# Altium PCB Peak Detector With Banking.PcbDoc (part 1 of 5)
Units mil, origin at the board's own origin, x right, y up, seen from the top; angles counter-clockwise.
Board outline 3330 x 2725 mil, 4 copper layers (TopLayer, GROUND, MidLayer1, BottomLayer); 549 components, 391 nets, 1594 pads, 460 vias.
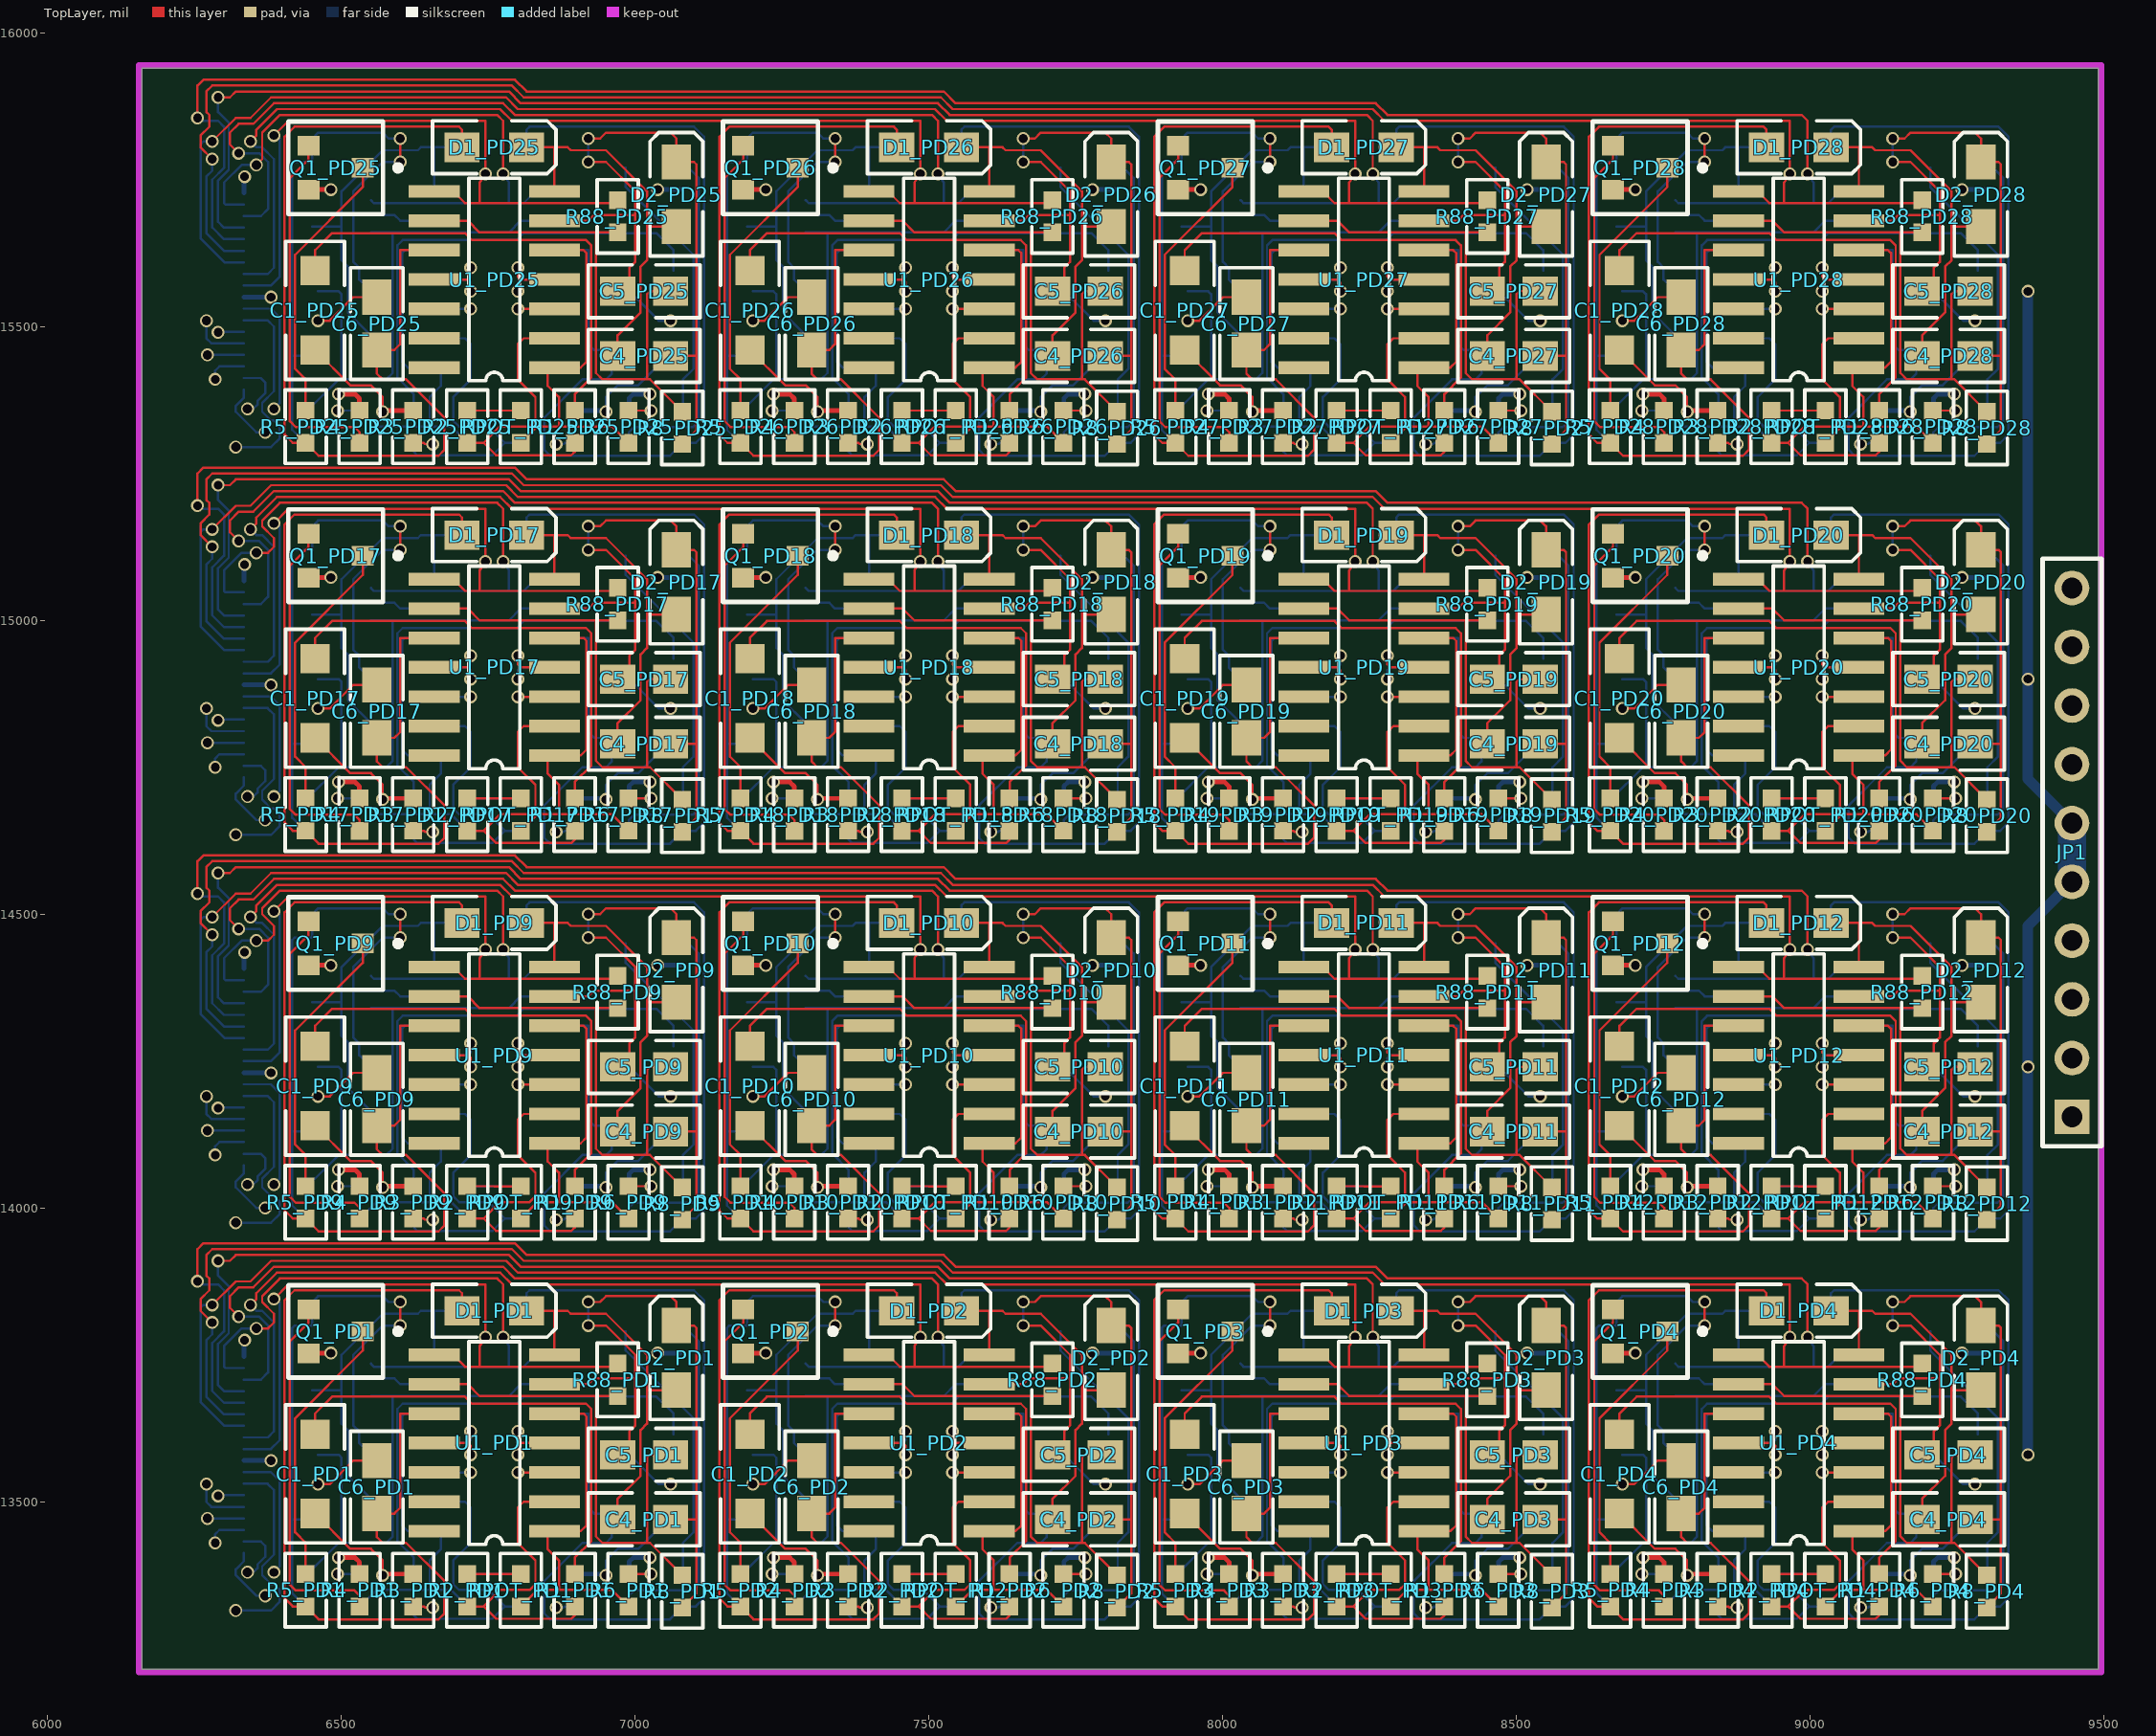
[diagram p0: TopLayer view]
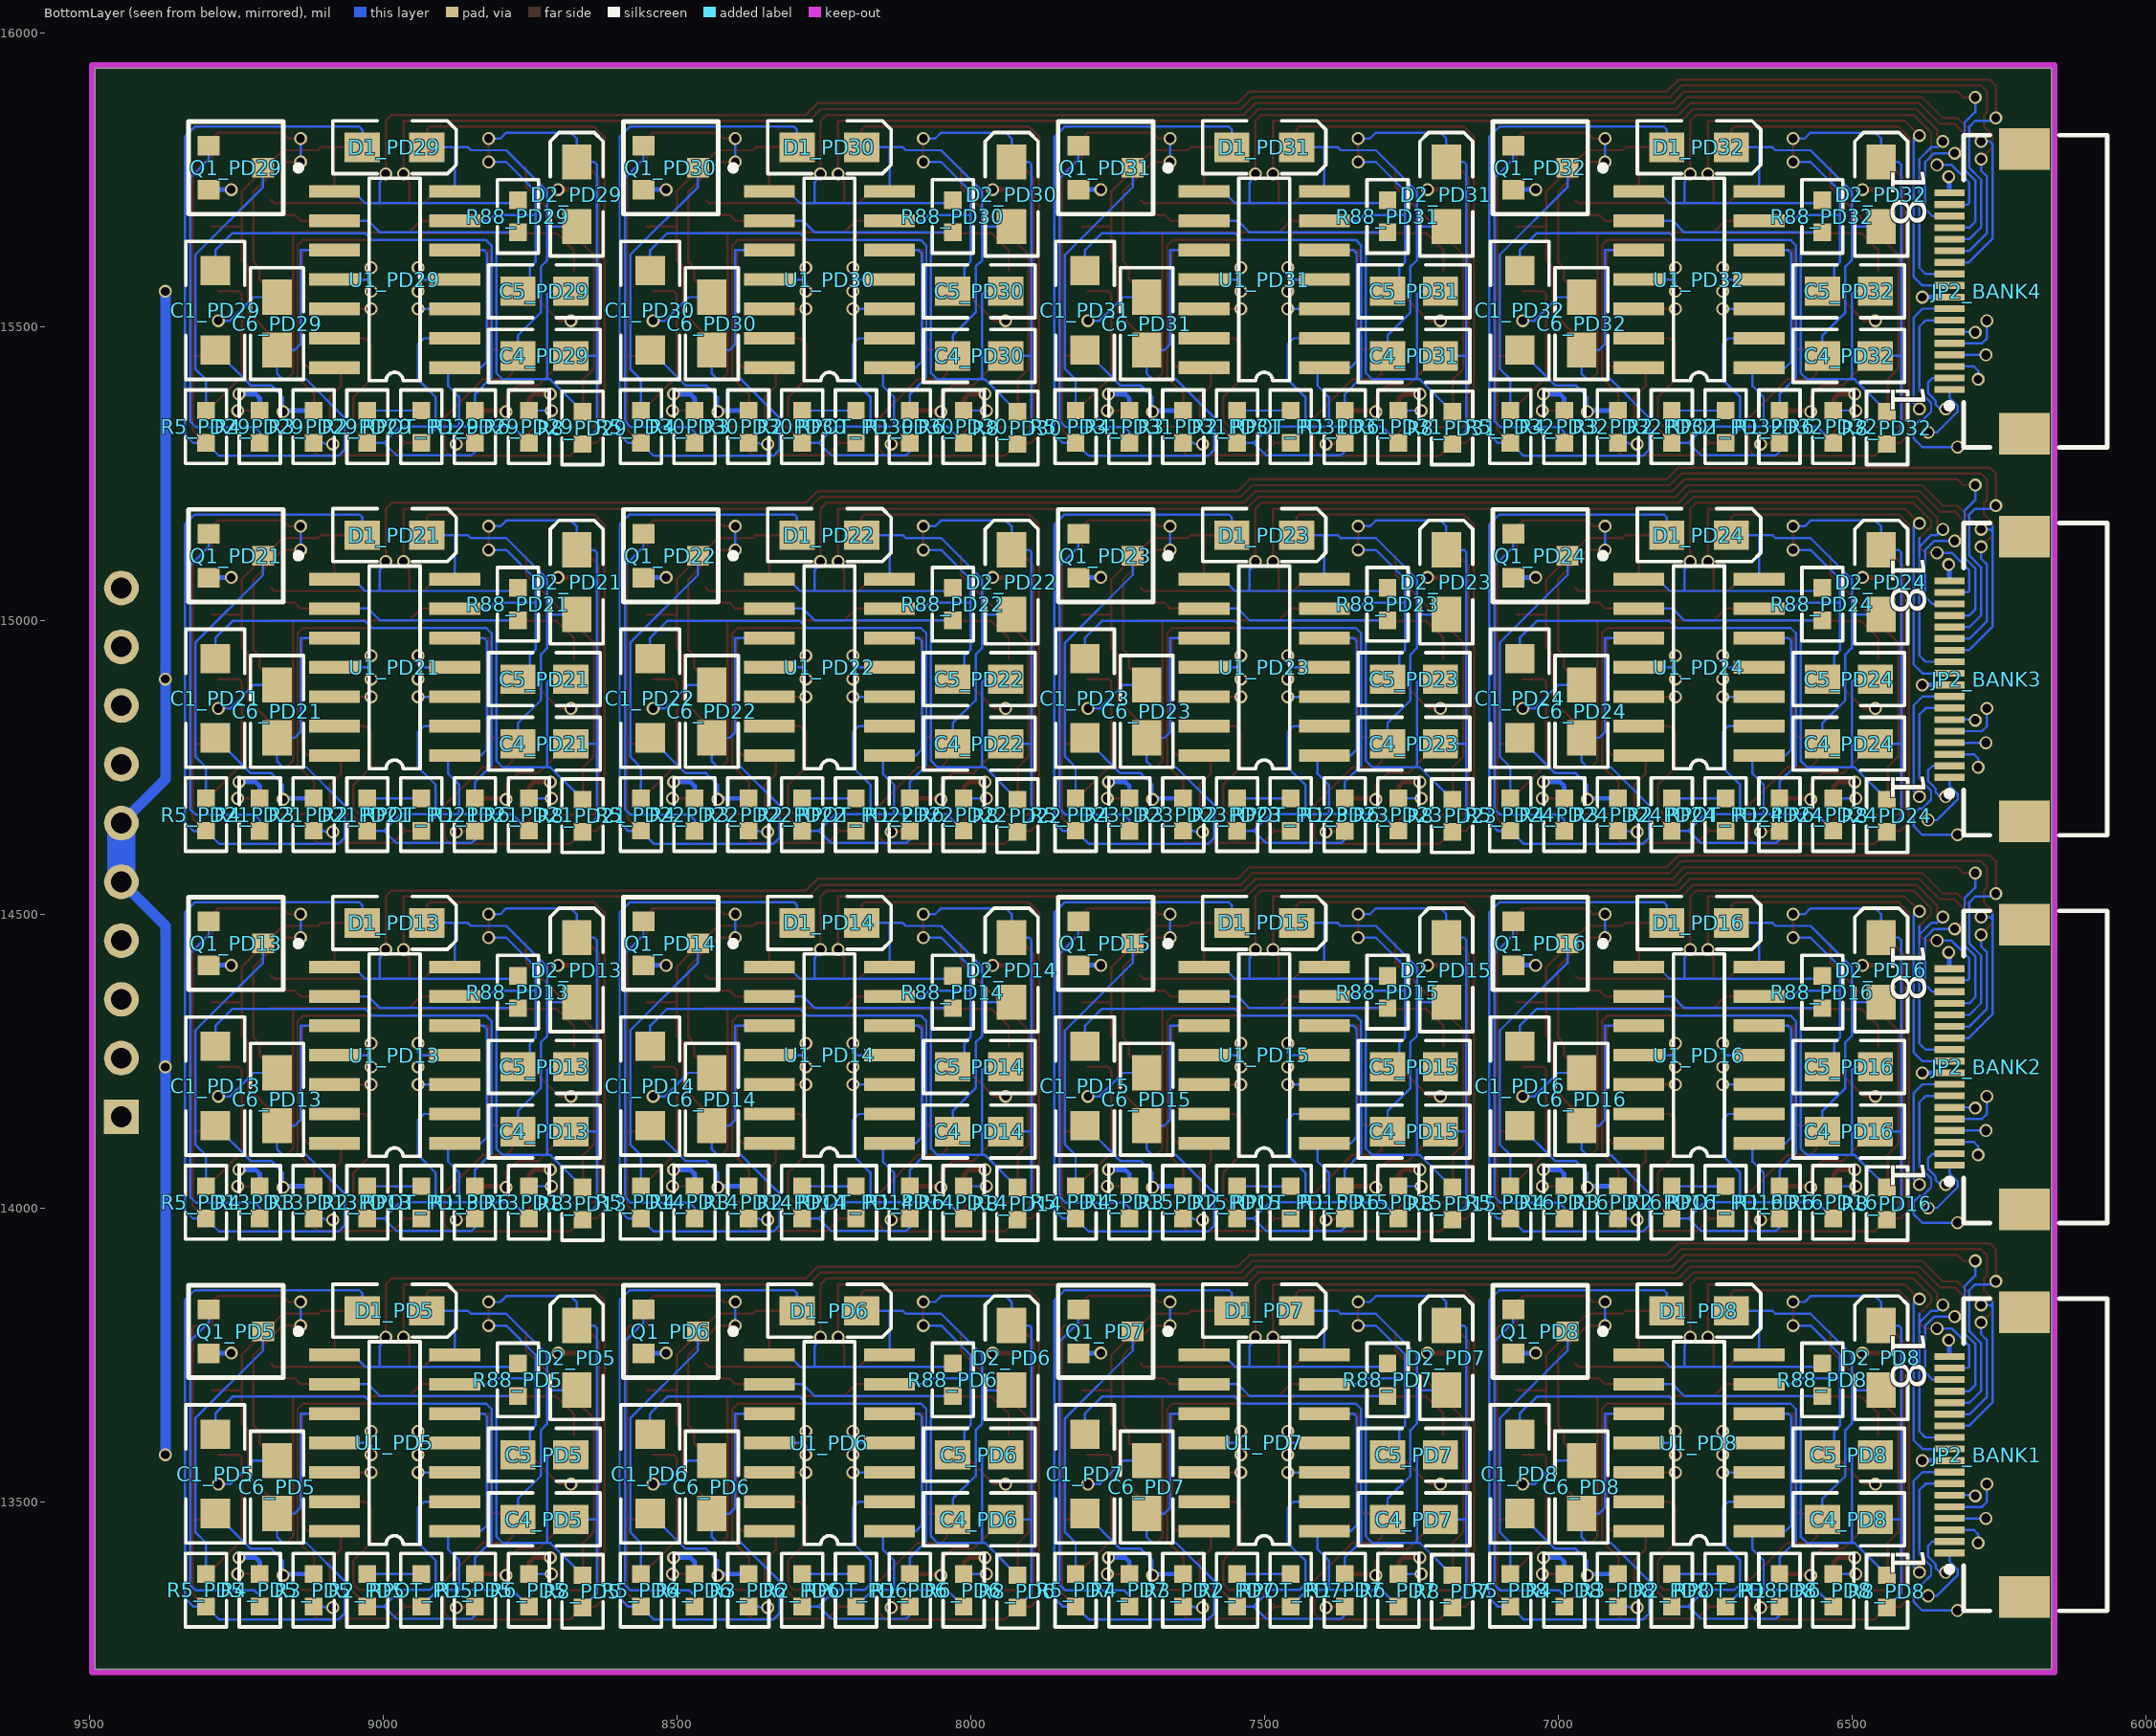
[diagram p1: BottomLayer view, seen from below]
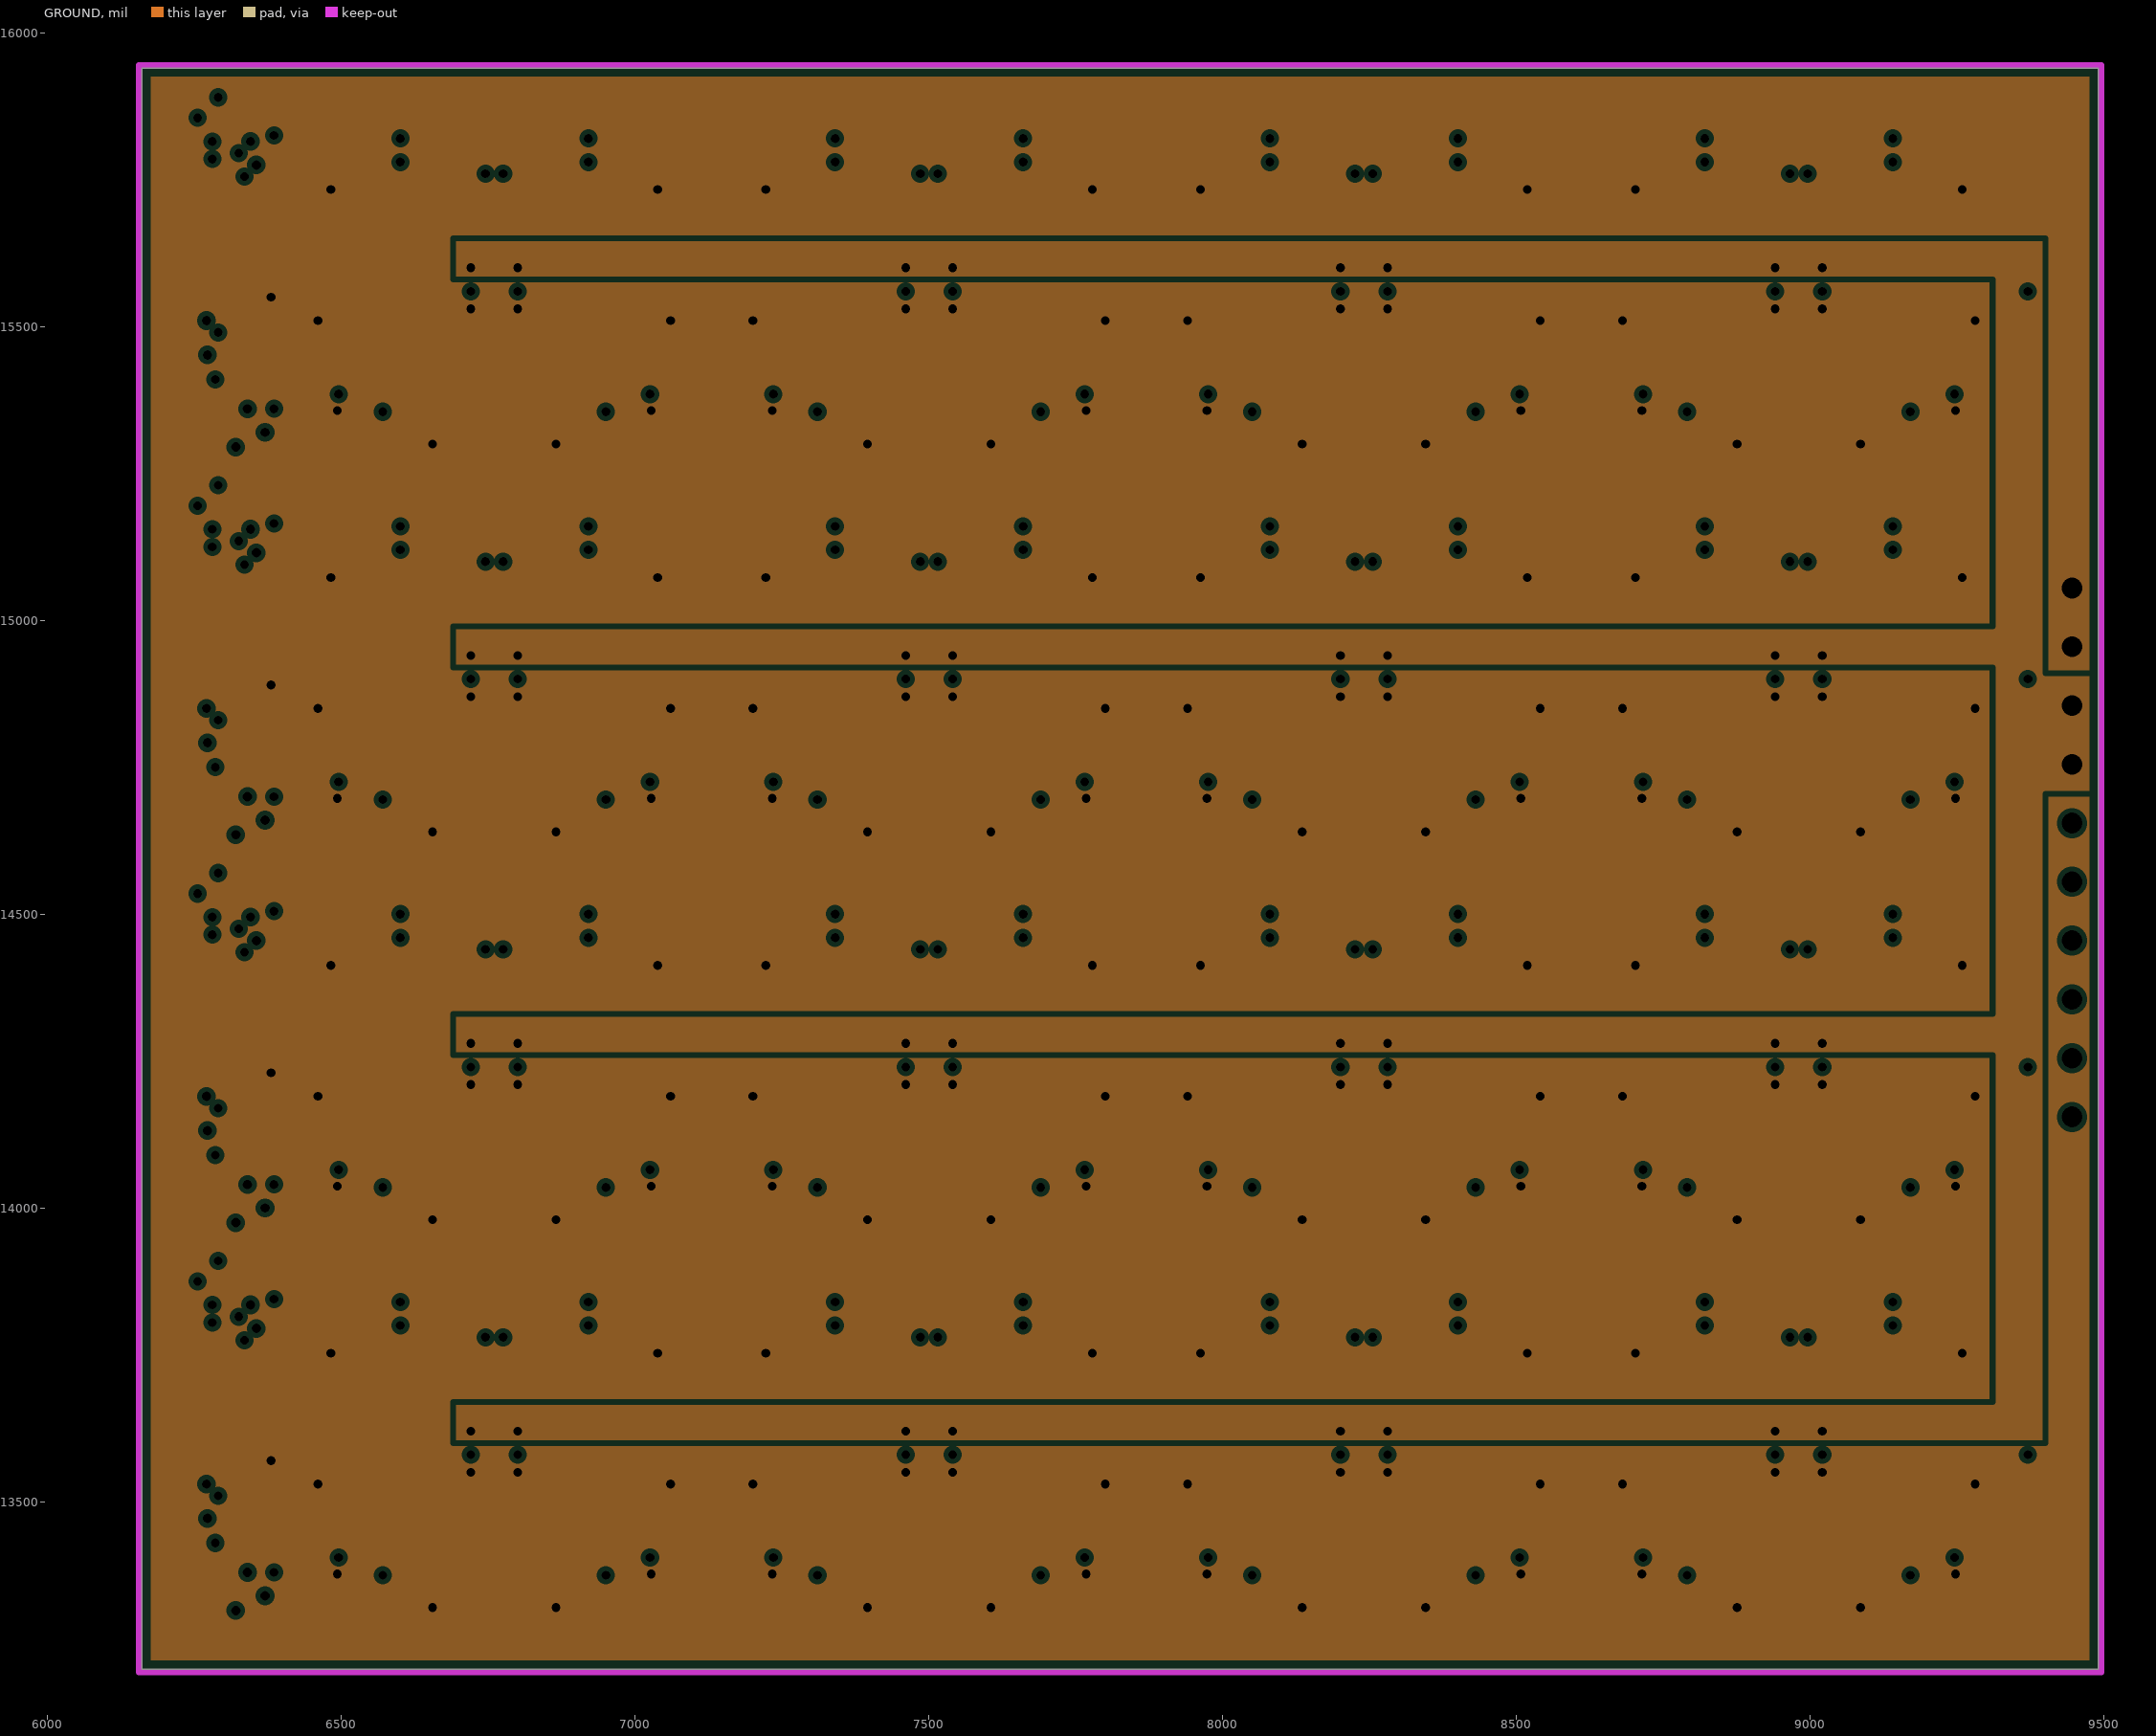
[diagram p2: GROUND, clearances drawn from the general rule]
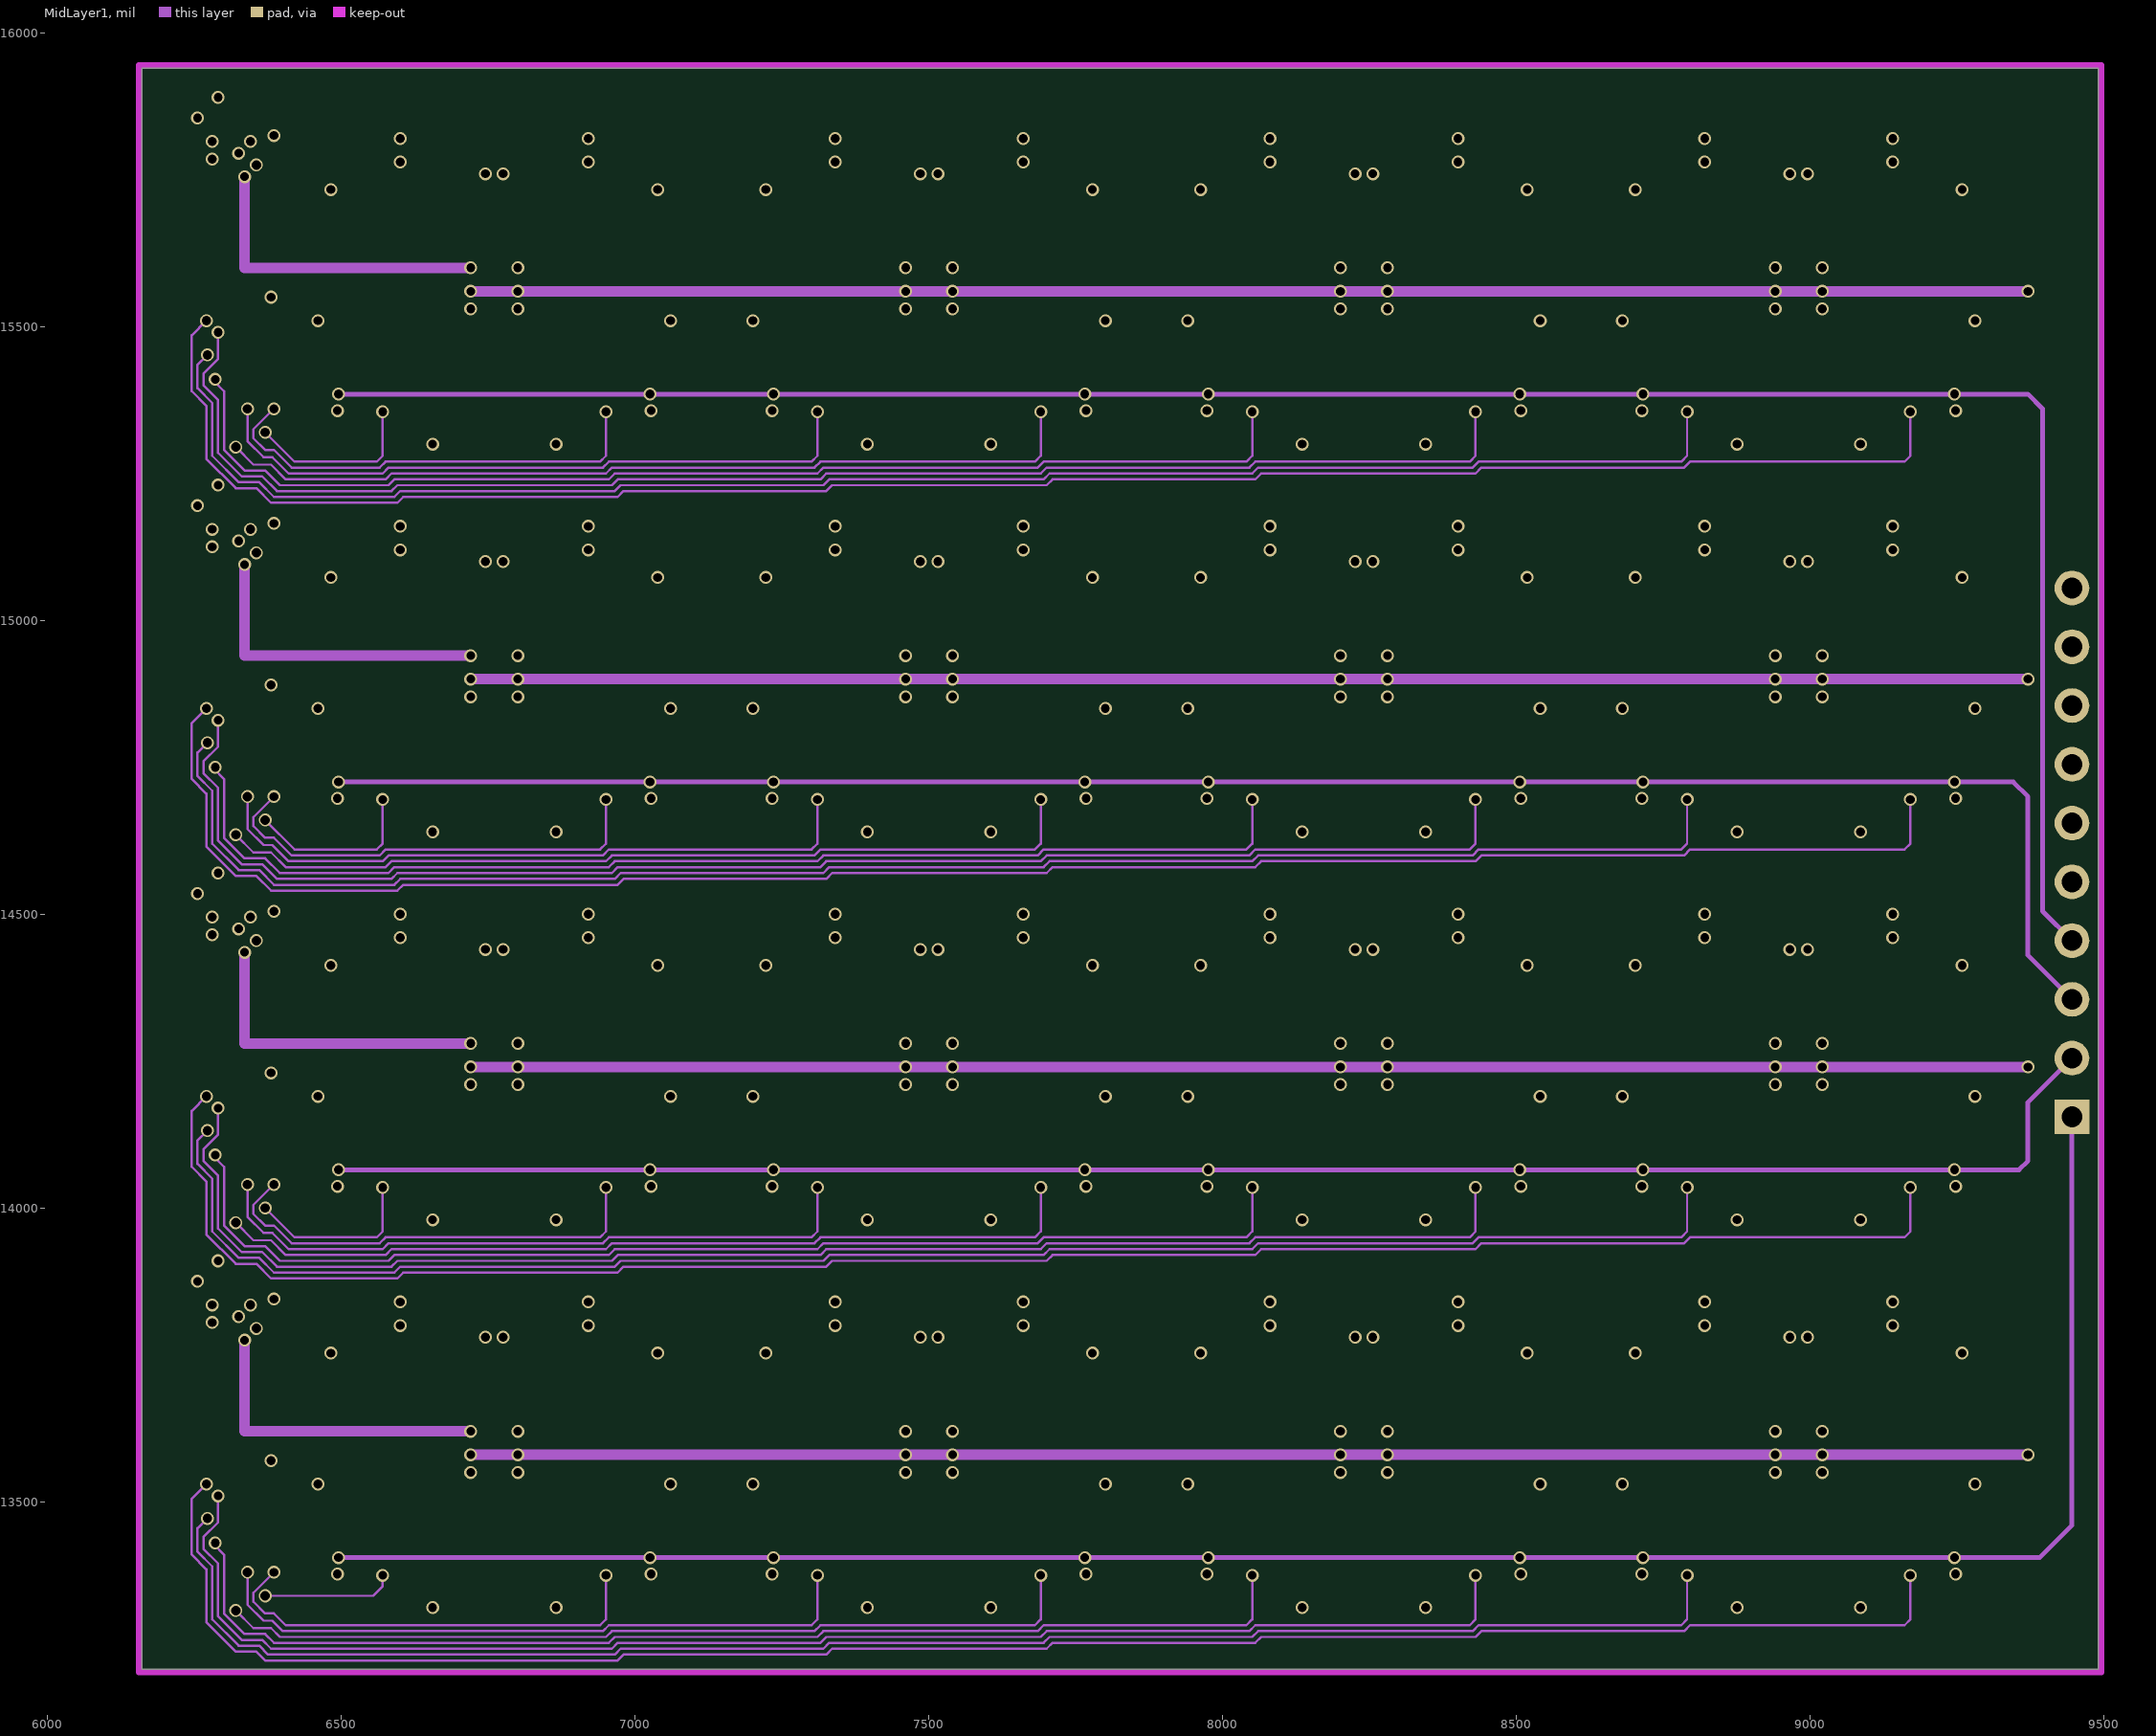
[diagram p3: MidLayer1]

## Layer stack, top to bottom
TopLayer: signal copper 1.4
Dielectric: core 12.6, FR-4, Dk 4.8
GROUND: plane copper 1.4, net (Multiple Nets)
Dielectric: prepreg 12.6, FR-4, Dk 4.8
MidLayer1: signal copper 1.4
Dielectric: core 12.6, FR-4, Dk 4.8
BottomLayer: signal copper 1.4

## Board outline
6160,13215 9490,13215 9490,15940 6160,15940

## Design rules (kind name [scope] priority, off if disabled: settings)
Clearance "Overlapping Pads" [IsPad vs IsPad] p1: gap=0
Clearance "Overlapping Vias" [IsVia vs IsVia] p2: gap=0
Clearance [All] p3: gap=4
ComponentClearance [All] p1: gap=1 collisioncheckmode=3 verticalgap=10 showdistances=FALSE
FabricationTestPointUsage TestPointUsage [All] p1: valid=0 allowmultiple=FALSE
FabricationTestpoint Testpoint [All] p1: side=3 testpointundercomponent=TRUE minsize=40 maxsize=100 preferedsize=60 minholesize=20 maxholesize=40 preferedholesize=32 testpointgrid=1 allowsidetop=TRUE allowsidebottom=TRUE usegrid=TRUE gridtolerance=0.01
MaxMinImpedance [All] p1: minimum=1.000 maximum=10.00
PlaneClearance [All] p1: clearance=8
PlaneConnect PlaneConnect_Rails [InNet('VCC5') Or InNet('VSSM5')] p1: planeconnectstyle=Direct reliefexpansion=12 reliefentries=4 reliefconductorwidth=10 reliefairgap=10
PlaneConnect [All] p2: planeconnectstyle=Relief reliefexpansion=10 reliefentries=4 reliefconductorwidth=10 reliefairgap=10
PolygonConnect [All] p1: connectstyle=Relief reliefconductorwidth=10 reliefentries=4 polygonreliefangle="90 Angle"
RoomDefinition BANKA_PD8 [InComponentClass('BANKA_PD8')] p1: confinementstyle=ConfineIn formatcopy=TRUE lockcomponents=FALSE outline 7120,13295 6400,13295 6400,13865 7120,13865
RoomDefinition BANKB_PD8 [InComponentClass('BANKB_PD8')] p2: confinementstyle=ConfineIn formatcopy=TRUE lockcomponents=FALSE outline 7120,13955 6400,13955 6400,14525 7120,14525
RoomDefinition BANKC_PD8 [InComponentClass('BANKC_PD8')] p3: confinementstyle=ConfineIn formatcopy=TRUE lockcomponents=FALSE outline 7120,14615 6400,14615 6400,15185 7120,15185
RoomDefinition BANKD_PD8 [InComponentClass('BANKD_PD8')] p4: confinementstyle=ConfineIn formatcopy=TRUE lockcomponents=FALSE outline 7120,15275 6400,15275 6400,15845 7120,15845
RoomDefinition BANKA_PD7 [InComponentClass('BANKA_PD7')] p5: confinementstyle=ConfineIn formatcopy=TRUE lockcomponents=FALSE outline 7860,13295 7140,13295 7140,13865 7860,13865
RoomDefinition BANKB_PD7 [InComponentClass('BANKB_PD7')] p6: confinementstyle=ConfineIn formatcopy=TRUE lockcomponents=FALSE outline 7860,13955 7140,13955 7140,14525 7860,14525
RoomDefinition BANKC_PD7 [InComponentClass('BANKC_PD7')] p7: confinementstyle=ConfineIn formatcopy=TRUE lockcomponents=FALSE outline 7860,14615 7140,14615 7140,15185 7860,15185
RoomDefinition BANKD_PD7 [InComponentClass('BANKD_PD7')] p8: confinementstyle=ConfineIn formatcopy=TRUE lockcomponents=FALSE outline 7860,15275 7140,15275 7140,15845 7860,15845
RoomDefinition BANKA_PD6 [InComponentClass('BANKA_PD6')] p9: confinementstyle=ConfineIn formatcopy=TRUE lockcomponents=FALSE outline 8600,13295 7880,13295 7880,13865 8600,13865
RoomDefinition BANKB_PD6 [InComponentClass('BANKB_PD6')] p10: confinementstyle=ConfineIn formatcopy=TRUE lockcomponents=FALSE outline 8600,13955 7880,13955 7880,14525 8600,14525
RoomDefinition BANKC_PD6 [InComponentClass('BANKC_PD6')] p11: confinementstyle=ConfineIn formatcopy=TRUE lockcomponents=FALSE outline 8600,14615 7880,14615 7880,15185 8600,15185
RoomDefinition BANKD_PD6 [InComponentClass('BANKD_PD6')] p12: confinementstyle=ConfineIn formatcopy=TRUE lockcomponents=FALSE outline 8600,15275 7880,15275 7880,15845 8600,15845
RoomDefinition BANKA_PD5 [InComponentClass('BANKA_PD5')] p13: confinementstyle=ConfineIn formatcopy=TRUE lockcomponents=FALSE outline 9340,13295 8620,13295 8620,13865 9340,13865
RoomDefinition BANKB_PD5 [InComponentClass('BANKB_PD5')] p14: confinementstyle=ConfineIn formatcopy=TRUE lockcomponents=FALSE outline 9340,13955 8620,13955 8620,14525 9340,14525
RoomDefinition BANKC_PD5 [InComponentClass('BANKC_PD5')] p15: confinementstyle=ConfineIn formatcopy=TRUE lockcomponents=FALSE outline 9340,14615 8620,14615 8620,15185 9340,15185
RoomDefinition BANKD_PD5 [InComponentClass('BANKD_PD5')] p16: confinementstyle=ConfineIn formatcopy=TRUE lockcomponents=FALSE outline 9340,15275 8620,15275 8620,15845 9340,15845
RoomDefinition BANKA_PD4 [InComponentClass('BANKA_PD4')] p17: confinementstyle=ConfineIn formatcopy=TRUE lockcomponents=FALSE outline 8620,13295 9340,13295 9340,13865 8620,13865
RoomDefinition BANKB_PD4 [InComponentClass('BANKB_PD4')] p18: confinementstyle=ConfineIn formatcopy=TRUE lockcomponents=FALSE outline 8620,13955 9340,13955 9340,14525 8620,14525
RoomDefinition BANKC_PD4 [InComponentClass('BANKC_PD4')] p19: confinementstyle=ConfineIn formatcopy=TRUE lockcomponents=FALSE outline 8620,14615 9340,14615 9340,15185 8620,15185
RoomDefinition BANKD_PD4 [InComponentClass('BANKD_PD4')] p20: confinementstyle=ConfineIn formatcopy=TRUE lockcomponents=FALSE outline 8620,15275 9340,15275 9340,15845 8620,15845
RoomDefinition BANKA_PD3 [InComponentClass('BANKA_PD3')] p21: confinementstyle=ConfineIn formatcopy=TRUE lockcomponents=FALSE outline 7880,13295 8600,13295 8600,13865 7880,13865
RoomDefinition BANKB_PD3 [InComponentClass('BANKB_PD3')] p22: confinementstyle=ConfineIn formatcopy=TRUE lockcomponents=FALSE outline 7880,13955 8600,13955 8600,14525 7880,14525
RoomDefinition BANKC_PD3 [InComponentClass('BANKC_PD3')] p23: confinementstyle=ConfineIn formatcopy=TRUE lockcomponents=FALSE outline 7880,14615 8600,14615 8600,15185 7880,15185
RoomDefinition BANKD_PD3 [InComponentClass('BANKD_PD3')] p24: confinementstyle=ConfineIn formatcopy=TRUE lockcomponents=FALSE outline 7880,15275 8600,15275 8600,15845 7880,15845
RoomDefinition BANKA_PD2 [InComponentClass('BANKA_PD2')] p25: confinementstyle=ConfineIn formatcopy=TRUE lockcomponents=FALSE outline 7140,13295 7860,13295 7860,13865 7140,13865
RoomDefinition BANKB_PD2 [InComponentClass('BANKB_PD2')] p26: confinementstyle=ConfineIn formatcopy=TRUE lockcomponents=FALSE outline 7140,13955 7860,13955 7860,14525 7140,14525
RoomDefinition BANKC_PD2 [InComponentClass('BANKC_PD2')] p27: confinementstyle=ConfineIn formatcopy=TRUE lockcomponents=FALSE outline 7140,14615 7860,14615 7860,15185 7140,15185
RoomDefinition BANKD_PD2 [InComponentClass('BANKD_PD2')] p28: confinementstyle=ConfineIn formatcopy=TRUE lockcomponents=FALSE outline 7140,15275 7860,15275 7860,15845 7140,15845
RoomDefinition BANKA_PD1 [InComponentClass('BANKA_PD1')] p29: confinementstyle=ConfineIn formatcopy=TRUE lockcomponents=FALSE outline 6400,13295 7120,13295 7120,13865 6400,13865
RoomDefinition BANKB_PD1 [InComponentClass('BANKB_PD1')] p30: confinementstyle=ConfineIn formatcopy=TRUE lockcomponents=FALSE outline 6400,13955 7120,13955 7120,14525 6400,14525
RoomDefinition BANKC_PD1 [InComponentClass('BANKC_PD1')] p31: confinementstyle=ConfineIn formatcopy=TRUE lockcomponents=FALSE outline 6400,14615 7120,14615 7120,15185 6400,15185
RoomDefinition BANKD [InComponentClass('BANKD')] p32: confinementstyle=ConfineIn formatcopy=TRUE lockcomponents=FALSE outline 6060.34,15277.44 6060.34,15842.56 6440.29,15842.56 6440.29,15277.44
RoomDefinition BANKC [InComponentClass('BANKC')] p33: confinementstyle=ConfineIn formatcopy=TRUE lockcomponents=FALSE outline 6060.34,14617.44 6060.34,15182.56 6440.29,15182.56 6440.29,14617.44
RoomDefinition BANKA [InComponentClass('BANKA')] p34: confinementstyle=ConfineIn formatcopy=TRUE lockcomponents=FALSE outline 6060.34,13297.44 6060.34,13862.56 6440.29,13862.56 6440.29,13297.44
RoomDefinition BANKD_PD1 [InComponentClass('BANKD_PD1')] p35: confinementstyle=ConfineIn formatcopy=TRUE lockcomponents=FALSE outline 6400,15275 7120,15275 7120,15845 6400,15845
RoomDefinition "Peak Detector" [InComponentClass('Peak Detector')] p36: confinementstyle=ConfineIn formatcopy=TRUE lockcomponents=FALSE outline 9400,14100 9400,15109.87 9495,15109.87 9495,14100
RoomDefinition BANKB [InComponentClass('BANKB')] p37: confinementstyle=ConfineIn formatcopy=TRUE lockcomponents=FALSE outline 6060.34,13957.44 6060.34,14522.56 6440.29,14522.56 6440.29,13957.44
RoutingVias [All] p1: holewidth=15 width=22 viastyle="Through Hole" minholewidth=15 minwidth=22 maxholewidth=16 maxwidth=22
SilkscreenOverComponentPads [All] p1: minsilkscreentomaskgap=10
SolderMaskExpansion [All] p1: expansion=4
Width "Power Nets" [InNet('VCC5') Or InNet('VSSM5')] p1: maxlimit=18 minlimit=4 preferedwidth=18
Width [All] p2: maxlimit=12 minlimit=4 preferedwidth=4
22 further rules are at their usual default settings.

## Classes and differential pairs
component class BANKA_PD8: C1_PD8 C4_PD8 C5_PD8 C6_PD8 D1_PD8 D2_PD8 Q1_PD8 R1_PD8 R2_PD8 R3_PD8 R4_PD8 R5_PD8 R6_PD8 R8_PD8 R88_PD8 RPOT_PD8 U1_PD8
component class BANKA_PD7: C1_PD7 C4_PD7 C5_PD7 C6_PD7 D1_PD7 D2_PD7 Q1_PD7 R1_PD7 R2_PD7 R3_PD7 R4_PD7 R5_PD7 R6_PD7 R8_PD7 R88_PD7 RPOT_PD7 U1_PD7
component class BANKA_PD6: C1_PD6 C4_PD6 C5_PD6 C6_PD6 D1_PD6 D2_PD6 Q1_PD6 R1_PD6 R2_PD6 R3_PD6 R4_PD6 R5_PD6 R6_PD6 R8_PD6 R88_PD6 RPOT_PD6 U1_PD6
component class BANKA_PD5: C1_PD5 C4_PD5 C5_PD5 C6_PD5 D1_PD5 D2_PD5 Q1_PD5 R1_PD5 R2_PD5 R3_PD5 R4_PD5 R5_PD5 R6_PD5 R8_PD5 R88_PD5 RPOT_PD5 U1_PD5
component class BANKA_PD1: C1_PD1 C4_PD1 C5_PD1 C6_PD1 D1_PD1 D2_PD1 Q1_PD1 R1_PD1 R2_PD1 R3_PD1 R4_PD1 R5_PD1 R6_PD1 R8_PD1 R88_PD1 RPOT_PD1 U1_PD1
component class BANKA_PD2: C1_PD2 C4_PD2 C5_PD2 C6_PD2 D1_PD2 D2_PD2 Q1_PD2 R1_PD2 R2_PD2 R3_PD2 R4_PD2 R5_PD2 R6_PD2 R8_PD2 R88_PD2 RPOT_PD2 U1_PD2
component class BANKA_PD3: C1_PD3 C4_PD3 C5_PD3 C6_PD3 D1_PD3 D2_PD3 Q1_PD3 R1_PD3 R2_PD3 R3_PD3 R4_PD3 R5_PD3 R6_PD3 R8_PD3 R88_PD3 RPOT_PD3 U1_PD3
component class BANKA_PD4: C1_PD4 C4_PD4 C5_PD4 C6_PD4 D1_PD4 D2_PD4 Q1_PD4 R1_PD4 R2_PD4 R3_PD4 R4_PD4 R5_PD4 R6_PD4 R8_PD4 R88_PD4 RPOT_PD4 U1_PD4
component class BANKA: JP2_BANK1
component class BANKB_PD1: C1_PD9 C4_PD9 C5_PD9 C6_PD9 D1_PD9 D2_PD9 Q1_PD9 R1_PD9 R2_PD9 R3_PD9 R4_PD9 R5_PD9 R6_PD9 R8_PD9 R88_PD9 RPOT_PD9 U1_PD9
component class BANKB_PD2: C1_PD10 C4_PD10 C5_PD10 C6_PD10 D1_PD10 D2_PD10 Q1_PD10 R1_PD10 R2_PD10 R3_PD10 R4_PD10 R5_PD10 R6_PD10 R8_PD10 R88_PD10 RPOT_PD10 U1_PD10
component class BANKB_PD3: C1_PD11 C4_PD11 C5_PD11 C6_PD11 D1_PD11 D2_PD11 Q1_PD11 R1_PD11 R2_PD11 R3_PD11 R4_PD11 R5_PD11 R6_PD11 R8_PD11 R88_PD11 RPOT_PD11 U1_PD11
component class BANKB_PD4: C1_PD12 C4_PD12 C5_PD12 C6_PD12 D1_PD12 D2_PD12 Q1_PD12 R1_PD12 R2_PD12 R3_PD12 R4_PD12 R5_PD12 R6_PD12 R8_PD12 R88_PD12 RPOT_PD12 U1_PD12
component class BANKB_PD5: C1_PD13 C4_PD13 C5_PD13 C6_PD13 D1_PD13 D2_PD13 Q1_PD13 R1_PD13 R2_PD13 R3_PD13 R4_PD13 R5_PD13 R6_PD13 R8_PD13 R88_PD13 RPOT_PD13 U1_PD13
component class BANKB_PD6: C1_PD14 C4_PD14 C5_PD14 C6_PD14 D1_PD14 D2_PD14 Q1_PD14 R1_PD14 R2_PD14 R3_PD14 R4_PD14 R5_PD14 R6_PD14 R8_PD14 R88_PD14 RPOT_PD14 U1_PD14
component class BANKB_PD7: C1_PD15 C4_PD15 C5_PD15 C6_PD15 D1_PD15 D2_PD15 Q1_PD15 R1_PD15 R2_PD15 R3_PD15 R4_PD15 R5_PD15 R6_PD15 R8_PD15 R88_PD15 RPOT_PD15 U1_PD15
component class BANKB_PD8: C1_PD16 C4_PD16 C5_PD16 C6_PD16 D1_PD16 D2_PD16 Q1_PD16 R1_PD16 R2_PD16 R3_PD16 R4_PD16 R5_PD16 R6_PD16 R8_PD16 R88_PD16 RPOT_PD16 U1_PD16
component class BANKB: JP2_BANK2
component class BANKC_PD1: C1_PD17 C4_PD17 C5_PD17 C6_PD17 D1_PD17 D2_PD17 Q1_PD17 R1_PD17 R2_PD17 R3_PD17 R4_PD17 R5_PD17 R6_PD17 R8_PD17 R88_PD17 RPOT_PD17 U1_PD17
component class BANKC_PD2: C1_PD18 C4_PD18 C5_PD18 C6_PD18 D1_PD18 D2_PD18 Q1_PD18 R1_PD18 R2_PD18 R3_PD18 R4_PD18 R5_PD18 R6_PD18 R8_PD18 R88_PD18 RPOT_PD18 U1_PD18
component class BANKC_PD3: C1_PD19 C4_PD19 C5_PD19 C6_PD19 D1_PD19 D2_PD19 Q1_PD19 R1_PD19 R2_PD19 R3_PD19 R4_PD19 R5_PD19 R6_PD19 R8_PD19 R88_PD19 RPOT_PD19 U1_PD19
component class BANKC_PD4: C1_PD20 C4_PD20 C5_PD20 C6_PD20 D1_PD20 D2_PD20 Q1_PD20 R1_PD20 R2_PD20 R3_PD20 R4_PD20 R5_PD20 R6_PD20 R8_PD20 R88_PD20 RPOT_PD20 U1_PD20
component class BANKC_PD5: C1_PD21 C4_PD21 C5_PD21 C6_PD21 D1_PD21 D2_PD21 Q1_PD21 R1_PD21 R2_PD21 R3_PD21 R4_PD21 R5_PD21 R6_PD21 R8_PD21 R88_PD21 RPOT_PD21 U1_PD21
component class BANKC_PD6: C1_PD22 C4_PD22 C5_PD22 C6_PD22 D1_PD22 D2_PD22 Q1_PD22 R1_PD22 R2_PD22 R3_PD22 R4_PD22 R5_PD22 R6_PD22 R8_PD22 R88_PD22 RPOT_PD22 U1_PD22
component class BANKC_PD7: C1_PD23 C4_PD23 C5_PD23 C6_PD23 D1_PD23 D2_PD23 Q1_PD23 R1_PD23 R2_PD23 R3_PD23 R4_PD23 R5_PD23 R6_PD23 R8_PD23 R88_PD23 RPOT_PD23 U1_PD23
component class BANKC_PD8: C1_PD24 C4_PD24 C5_PD24 C6_PD24 D1_PD24 D2_PD24 Q1_PD24 R1_PD24 R2_PD24 R3_PD24 R4_PD24 R5_PD24 R6_PD24 R8_PD24 R88_PD24 RPOT_PD24 U1_PD24
component class BANKC: JP2_BANK3
component class BANKD_PD1: C1_PD25 C4_PD25 C5_PD25 C6_PD25 D1_PD25 D2_PD25 Q1_PD25 R1_PD25 R2_PD25 R3_PD25 R4_PD25 R5_PD25 R6_PD25 R8_PD25 R88_PD25 RPOT_PD25 U1_PD25
component class BANKD_PD2: C1_PD26 C4_PD26 C5_PD26 C6_PD26 D1_PD26 D2_PD26 Q1_PD26 R1_PD26 R2_PD26 R3_PD26 R4_PD26 R5_PD26 R6_PD26 R8_PD26 R88_PD26 RPOT_PD26 U1_PD26
component class BANKD_PD3: C1_PD27 C4_PD27 C5_PD27 C6_PD27 D1_PD27 D2_PD27 Q1_PD27 R1_PD27 R2_PD27 R3_PD27 R4_PD27 R5_PD27 R6_PD27 R8_PD27 R88_PD27 RPOT_PD27 U1_PD27
component class BANKD_PD4: C1_PD28 C4_PD28 C5_PD28 C6_PD28 D1_PD28 D2_PD28 Q1_PD28 R1_PD28 R2_PD28 R3_PD28 R4_PD28 R5_PD28 R6_PD28 R8_PD28 R88_PD28 RPOT_PD28 U1_PD28
component class BANKD_PD5: C1_PD29 C4_PD29 C5_PD29 C6_PD29 D1_PD29 D2_PD29 Q1_PD29 R1_PD29 R2_PD29 R3_PD29 R4_PD29 R5_PD29 R6_PD29 R8_PD29 R88_PD29 RPOT_PD29 U1_PD29
component class BANKD_PD6: C1_PD30 C4_PD30 C5_PD30 C6_PD30 D1_PD30 D2_PD30 Q1_PD30 R1_PD30 R2_PD30 R3_PD30 R4_PD30 R5_PD30 R6_PD30 R8_PD30 R88_PD30 RPOT_PD30 U1_PD30
component class BANKD_PD7: C1_PD31 C4_PD31 C5_PD31 C6_PD31 D1_PD31 D2_PD31 Q1_PD31 R1_PD31 R2_PD31 R3_PD31 R4_PD31 R5_PD31 R6_PD31 R8_PD31 R88_PD31 RPOT_PD31 U1_PD31
component class BANKD_PD8: C1_PD32 C4_PD32 C5_PD32 C6_PD32 D1_PD32 D2_PD32 Q1_PD32 R1_PD32 R2_PD32 R3_PD32 R4_PD32 R5_PD32 R6_PD32 R8_PD32 R88_PD32 RPOT_PD32 U1_PD32
component class BANKD: JP2_BANK4
component class "Peak Detector": JP1
channel class Bank: BANKA BANKB BANKC BANKD
channel class "Peak Detector - channel": BANKA_PD1 BANKA_PD2 BANKA_PD3 BANKA_PD4 BANKA_PD5 BANKA_PD6 BANKA_PD7 BANKA_PD8 BANKB_PD1 BANKB_PD2 BANKB_PD3 BANKB_PD4 BANKB_PD5 BANKB_PD6 BANKB_PD7 BANKB_PD8 BANKC_PD1 BANKC_PD2 BANKC_PD3 BANKC_PD4 BANKC_PD5 BANKC_PD6 BANKC_PD7 BANKC_PD8 BANKD_PD1 BANKD_PD2 BANKD_PD3 BANKD_PD4 BANKD_PD5 BANKD_PD6 BANKD_PD7 BANKD_PD8
net class OFF[1..4]: OFF1 OFF2 OFF3 OFF4

## Components (designator, comment, footprint, x,y, rotation, side; value= is the part's Value field where it differs from the comment)
C1_PD1 "10uF" 1206 6455,13615 r270 top (schematic designator C1)
C1_PD2 "10uF" 1206 7195,13615 r270 top (schematic designator C1)
C1_PD3 "10uF" 1206 7935,13615 r270 top (schematic designator C1)
C1_PD4 "10uF" 1206 8675,13615 r270 top (schematic designator C1)
C1_PD5 "10uF" 1206 9285,13615 r270 bottom (schematic designator C1)
C1_PD6 "10uF" 1206 8545,13615 r270 bottom (schematic designator C1)
C1_PD7 "10uF" 1206 7805,13615 r270 bottom (schematic designator C1)
C1_PD8 "10uF" 1206 7065,13615 r270 bottom (schematic designator C1)
C1_PD9 "10uF" 1206 6455,14275 r270 top (schematic designator C1)
C1_PD10 "10uF" 1206 7195,14275 r270 top (schematic designator C1)
C1_PD11 "10uF" 1206 7935,14275 r270 top (schematic designator C1)
C1_PD12 "10uF" 1206 8675,14275 r270 top (schematic designator C1)
C1_PD13 "10uF" 1206 9285,14275 r270 bottom (schematic designator C1)
C1_PD14 "10uF" 1206 8545,14275 r270 bottom (schematic designator C1)
C1_PD15 "10uF" 1206 7805,14275 r270 bottom (schematic designator C1)
C1_PD16 "10uF" 1206 7065,14275 r270 bottom (schematic designator C1)
C1_PD17 "10uF" 1206 6455,14935 r270 top (schematic designator C1)
C1_PD18 "10uF" 1206 7195,14935 r270 top (schematic designator C1)
C1_PD19 "10uF" 1206 7935,14935 r270 top (schematic designator C1)
C1_PD20 "10uF" 1206 8675,14935 r270 top (schematic designator C1)
C1_PD21 "10uF" 1206 9285,14935 r270 bottom (schematic designator C1)
C1_PD22 "10uF" 1206 8545,14935 r270 bottom (schematic designator C1)
C1_PD23 "10uF" 1206 7805,14935 r270 bottom (schematic designator C1)
C1_PD24 "10uF" 1206 7065,14935 r270 bottom (schematic designator C1)
C1_PD25 "10uF" 1206 6455,15595 r270 top (schematic designator C1)
C1_PD26 "10uF" 1206 7195,15595 r270 top (schematic designator C1)
C1_PD27 "10uF" 1206 7935,15595 r270 top (schematic designator C1)
C1_PD28 "10uF" 1206 8675,15595 r270 top (schematic designator C1)
C1_PD29 "10uF" 1206 9285,15595 r270 bottom (schematic designator C1)
C1_PD30 "10uF" 1206 8545,15595 r270 bottom (schematic designator C1)
C1_PD31 "10uF" 1206 7805,15595 r270 bottom (schematic designator C1)
C1_PD32 "10uF" 1206 7065,15595 r270 bottom (schematic designator C1)
C4_PD1 "15pF" 0805 7060,13470 r180 top (schematic designator C4)
C4_PD2 "15pF" 0805 7800,13470 r180 top (schematic designator C4)
C4_PD3 "15pF" 0805 8540,13470 r180 top (schematic designator C4)
C4_PD4 "15pF" 0805 9280,13470 r180 top (schematic designator C4)
C4_PD5 "15pF" 0805 8680,13470 r0 bottom (schematic designator C4)
C4_PD6 "15pF" 0805 7940,13470 r0 bottom (schematic designator C4)
C4_PD7 "15pF" 0805 7200,13470 r0 bottom (schematic designator C4)
C4_PD8 "15pF" 0805 6460,13470 r0 bottom (schematic designator C4)
C4_PD9 "15pF" 0805 7060,14130 r180 top (schematic designator C4)
C4_PD10 "15pF" 0805 7800,14130 r180 top (schematic designator C4)
C4_PD11 "15pF" 0805 8540,14130 r180 top (schematic designator C4)
C4_PD12 "15pF" 0805 9280,14130 r180 top (schematic designator C4)
C4_PD13 "15pF" 0805 8680,14130 r0 bottom (schematic designator C4)
C4_PD14 "15pF" 0805 7940,14130 r0 bottom (schematic designator C4)
C4_PD15 "15pF" 0805 7200,14130 r0 bottom (schematic designator C4)
C4_PD16 "15pF" 0805 6460,14130 r0 bottom (schematic designator C4)
C4_PD17 "15pF" 0805 7060,14790 r180 top (schematic designator C4)
C4_PD18 "15pF" 0805 7800,14790 r180 top (schematic designator C4)
C4_PD19 "15pF" 0805 8540,14790 r180 top (schematic designator C4)
C4_PD20 "15pF" 0805 9280,14790 r180 top (schematic designator C4)
C4_PD21 "15pF" 0805 8680,14790 r0 bottom (schematic designator C4)
C4_PD22 "15pF" 0805 7940,14790 r0 bottom (schematic designator C4)
C4_PD23 "15pF" 0805 7200,14790 r0 bottom (schematic designator C4)
C4_PD24 "15pF" 0805 6460,14790 r0 bottom (schematic designator C4)
C4_PD25 "15pF" 0805 7060,15450 r180 top (schematic designator C4)
C4_PD26 "15pF" 0805 7800,15450 r180 top (schematic designator C4)
C4_PD27 "15pF" 0805 8540,15450 r180 top (schematic designator C4)
C4_PD28 "15pF" 0805 9280,15450 r180 top (schematic designator C4)
C4_PD29 "15pF" 0805 8680,15450 r0 bottom (schematic designator C4)
C4_PD30 "15pF" 0805 7940,15450 r0 bottom (schematic designator C4)
C4_PD31 "15pF" 0805 7200,15450 r0 bottom (schematic designator C4)
C4_PD32 "15pF" 0805 6460,15450 r0 bottom (schematic designator C4)
C5_PD1 "4.7pF" 0805 6970,13580 r0 top (schematic designator C5)
C5_PD2 "4.7pF" 0805 7710,13580 r0 top (schematic designator C5)
C5_PD3 "4.7pF" 0805 8450,13580 r0 top (schematic designator C5)
C5_PD4 "4.7pF" 0805 9190,13580 r0 top (schematic designator C5)
C5_PD5 "4.7pF" 0805 8770,13580 r180 bottom (schematic designator C5)
C5_PD6 "4.7pF" 0805 8030,13580 r180 bottom (schematic designator C5)
C5_PD7 "4.7pF" 0805 7290,13580 r180 bottom (schematic designator C5)
C5_PD8 "4.7pF" 0805 6550,13580 r180 bottom (schematic designator C5)
C5_PD9 "4.7pF" 0805 6970,14240 r0 top (schematic designator C5)
C5_PD10 "4.7pF" 0805 7710,14240 r0 top (schematic designator C5)
C5_PD11 "4.7pF" 0805 8450,14240 r0 top (schematic designator C5)
C5_PD12 "4.7pF" 0805 9190,14240 r0 top (schematic designator C5)
C5_PD13 "4.7pF" 0805 8770,14240 r180 bottom (schematic designator C5)
C5_PD14 "4.7pF" 0805 8030,14240 r180 bottom (schematic designator C5)
C5_PD15 "4.7pF" 0805 7290,14240 r180 bottom (schematic designator C5)
C5_PD16 "4.7pF" 0805 6550,14240 r180 bottom (schematic designator C5)
C5_PD17 "4.7pF" 0805 6970,14900 r0 top (schematic designator C5)
C5_PD18 "4.7pF" 0805 7710,14900 r0 top (schematic designator C5)
C5_PD19 "4.7pF" 0805 8450,14900 r0 top (schematic designator C5)
C5_PD20 "4.7pF" 0805 9190,14900 r0 top (schematic designator C5)
C5_PD21 "4.7pF" 0805 8770,14900 r180 bottom (schematic designator C5)
C5_PD22 "4.7pF" 0805 8030,14900 r180 bottom (schematic designator C5)
C5_PD23 "4.7pF" 0805 7290,14900 r180 bottom (schematic designator C5)
C5_PD24 "4.7pF" 0805 6550,14900 r180 bottom (schematic designator C5)
C5_PD25 "4.7pF" 0805 6970,15560 r0 top (schematic designator C5)
C5_PD26 "4.7pF" 0805 7710,15560 r0 top (schematic designator C5)
C5_PD27 "4.7pF" 0805 8450,15560 r0 top (schematic designator C5)
C5_PD28 "4.7pF" 0805 9190,15560 r0 top (schematic designator C5)
C5_PD29 "4.7pF" 0805 8770,15560 r180 bottom (schematic designator C5)
C5_PD30 "4.7pF" 0805 8030,15560 r180 bottom (schematic designator C5)
C5_PD31 "4.7pF" 0805 7290,15560 r180 bottom (schematic designator C5)
C5_PD32 "4.7pF" 0805 6550,15560 r180 bottom (schematic designator C5)
C6_PD1 "1.0n" 0805 6560,13570 r270 top (schematic designator C6)
C6_PD2 "1.0n" 0805 7300,13570 r270 top (schematic designator C6)
C6_PD3 "1.0n" 0805 8040,13570 r270 top (schematic designator C6)
C6_PD4 "1.0n" 0805 8780,13570 r270 top (schematic designator C6)
C6_PD5 "1.0n" 0805 9180,13570 r270 bottom (schematic designator C6)
C6_PD6 "1.0n" 0805 8440,13570 r270 bottom (schematic designator C6)
C6_PD7 "1.0n" 0805 7700,13570 r270 bottom (schematic designator C6)
C6_PD8 "1.0n" 0805 6960,13570 r270 bottom (schematic designator C6)
C6_PD9 "1.0n" 0805 6560,14230 r270 top (schematic designator C6)
C6_PD10 "1.0n" 0805 7300,14230 r270 top (schematic designator C6)
C6_PD11 "1.0n" 0805 8040,14230 r270 top (schematic designator C6)
C6_PD12 "1.0n" 0805 8780,14230 r270 top (schematic designator C6)
C6_PD13 "1.0n" 0805 9180,14230 r270 bottom (schematic designator C6)
C6_PD14 "1.0n" 0805 8440,14230 r270 bottom (schematic designator C6)
C6_PD15 "1.0n" 0805 7700,14230 r270 bottom (schematic designator C6)
C6_PD16 "1.0n" 0805 6960,14230 r270 bottom (schematic designator C6)
C6_PD17 "1.0n" 0805 6560,14890 r270 top (schematic designator C6)
C6_PD18 "1.0n" 0805 7300,14890 r270 top (schematic designator C6)
C6_PD19 "1.0n" 0805 8040,14890 r270 top (schematic designator C6)
C6_PD20 "1.0n" 0805 8780,14890 r270 top (schematic designator C6)
C6_PD21 "1.0n" 0805 9180,14890 r270 bottom (schematic designator C6)
C6_PD22 "1.0n" 0805 8440,14890 r270 bottom (schematic designator C6)
C6_PD23 "1.0n" 0805 7700,14890 r270 bottom (schematic designator C6)
C6_PD24 "1.0n" 0805 6960,14890 r270 bottom (schematic designator C6)
C6_PD25 "1.0n" 0805 6560,15550 r270 top (schematic designator C6)
C6_PD26 "1.0n" 0805 7300,15550 r270 top (schematic designator C6)
C6_PD27 "1.0n" 0805 8040,15550 r270 top (schematic designator C6)
C6_PD28 "1.0n" 0805 8780,15550 r270 top (schematic designator C6)
C6_PD29 "1.0n" 0805 9180,15550 r270 bottom (schematic designator C6)
C6_PD30 "1.0n" 0805 8440,15550 r270 bottom (schematic designator C6)
C6_PD31 "1.0n" 0805 7700,15550 r270 bottom (schematic designator C6)
C6_PD32 "1.0n" 0805 6960,15550 r270 bottom (schematic designator C6)
D1_PD1 "1N914" 3216 6815,13825 r0 top (schematic designator D1)
D1_PD2 "1N914" 3216 7555,13825 r0 top (schematic designator D1)
D1_PD3 "1N914" 3216 8295,13825 r0 top (schematic designator D1)
D1_PD4 "1N914" 3216 9035,13825 r0 top (schematic designator D1)
D1_PD5 "1N914" 3216 8925,13825 r180 bottom (schematic designator D1)
D1_PD6 "1N914" 3216 8185,13825 r180 bottom (schematic designator D1)
D1_PD7 "1N914" 3216 7445,13825 r180 bottom (schematic designator D1)
D1_PD8 "1N914" 3216 6705,13825 r180 bottom (schematic designator D1)
D1_PD9 "1N914" 3216 6815,14485 r0 top (schematic designator D1)
D1_PD10 "1N914" 3216 7555,14485 r0 top (schematic designator D1)
D1_PD11 "1N914" 3216 8295,14485 r0 top (schematic designator D1)
D1_PD12 "1N914" 3216 9035,14485 r0 top (schematic designator D1)
D1_PD13 "1N914" 3216 8925,14485 r180 bottom (schematic designator D1)
D1_PD14 "1N914" 3216 8185,14485 r180 bottom (schematic designator D1)
D1_PD15 "1N914" 3216 7445,14485 r180 bottom (schematic designator D1)
D1_PD16 "1N914" 3216 6705,14485 r180 bottom (schematic designator D1)
D1_PD17 "1N914" 3216 6815,15145 r0 top (schematic designator D1)
D1_PD18 "1N914" 3216 7555,15145 r0 top (schematic designator D1)
D1_PD19 "1N914" 3216 8295,15145 r0 top (schematic designator D1)
D1_PD20 "1N914" 3216 9035,15145 r0 top (schematic designator D1)
D1_PD21 "1N914" 3216 8925,15145 r180 bottom (schematic designator D1)
D1_PD22 "1N914" 3216 8185,15145 r180 bottom (schematic designator D1)
D1_PD23 "1N914" 3216 7445,15145 r180 bottom (schematic designator D1)
D1_PD24 "1N914" 3216 6705,15145 r180 bottom (schematic designator D1)
D1_PD25 "1N914" 3216 6815,15805 r0 top (schematic designator D1)
D1_PD26 "1N914" 3216 7555,15805 r0 top (schematic designator D1)
D1_PD27 "1N914" 3216 8295,15805 r0 top (schematic designator D1)
D1_PD28 "1N914" 3216 9035,15805 r0 top (schematic designator D1)
D1_PD29 "1N914" 3216 8925,15805 r180 bottom (schematic designator D1)
D1_PD30 "1N914" 3216 8185,15805 r180 bottom (schematic designator D1)
D1_PD31 "1N914" 3216 7445,15805 r180 bottom (schematic designator D1)
D1_PD32 "1N914" 3216 6705,15805 r180 bottom (schematic designator D1)
D2_PD1 "1N914" 3216 7070,13800 r90 top (schematic designator D2)
D2_PD2 "1N914" 3216 7810,13800 r90 top (schematic designator D2)
D2_PD3 "1N914" 3216 8550,13800 r90 top (schematic designator D2)
D2_PD4 "1N914" 3216 9290,13800 r90 top (schematic designator D2)
D2_PD5 "1N914" 3216 8670,13800 r90 bottom (schematic designator D2)
D2_PD6 "1N914" 3216 7930,13800 r90 bottom (schematic designator D2)
D2_PD7 "1N914" 3216 7190,13800 r90 bottom (schematic designator D2)
D2_PD8 "1N914" 3216 6450,13800 r90 bottom (schematic designator D2)
D2_PD9 "1N914" 3216 7070,14460 r90 top (schematic designator D2)
D2_PD10 "1N914" 3216 7810,14460 r90 top (schematic designator D2)
D2_PD11 "1N914" 3216 8550,14460 r90 top (schematic designator D2)
D2_PD12 "1N914" 3216 9290,14460 r90 top (schematic designator D2)
D2_PD13 "1N914" 3216 8670,14460 r90 bottom (schematic designator D2)
D2_PD14 "1N914" 3216 7930,14460 r90 bottom (schematic designator D2)
D2_PD15 "1N914" 3216 7190,14460 r90 bottom (schematic designator D2)
D2_PD16 "1N914" 3216 6450,14460 r90 bottom (schematic designator D2)
D2_PD17 "1N914" 3216 7070,15120 r90 top (schematic designator D2)
D2_PD18 "1N914" 3216 7810,15120 r90 top (schematic designator D2)
D2_PD19 "1N914" 3216 8550,15120 r90 top (schematic designator D2)
D2_PD20 "1N914" 3216 9290,15120 r90 top (schematic designator D2)
D2_PD21 "1N914" 3216 8670,15120 r90 bottom (schematic designator D2)
D2_PD22 "1N914" 3216 7930,15120 r90 bottom (schematic designator D2)
D2_PD23 "1N914" 3216 7190,15120 r90 bottom (schematic designator D2)
D2_PD24 "1N914" 3216 6450,15120 r90 bottom (schematic designator D2)
D2_PD25 "1N914" 3216 7070,15780 r90 top (schematic designator D2)
D2_PD26 "1N914" 3216 7810,15780 r90 top (schematic designator D2)
D2_PD27 "1N914" 3216 8550,15780 r90 top (schematic designator D2)
D2_PD28 "1N914" 3216 9290,15780 r90 top (schematic designator D2)
D2_PD29 "1N914" 3216 8670,15780 r90 bottom (schematic designator D2)
D2_PD30 "1N914" 3216 7930,15780 r90 bottom (schematic designator D2)
D2_PD31 "1N914" 3216 7190,15780 r90 bottom (schematic designator D2)
D2_PD32 "1N914" 3216 6450,15780 r90 bottom (schematic designator D2)
JP1 "Header 10" HDR1X10 9445,14155 r90 top
JP2_BANK1 "Header 9X2A" FFC/SM0.5-2H18A 6270,13580 r270 bottom (schematic designator JP2)
JP2_BANK2 "Header 9X2A" FFC/SM0.5-2H18A 6270,14240 r270 bottom (schematic designator JP2)
JP2_BANK3 "Header 9X2A" FFC/SM0.5-2H18A 6270,14900 r270 bottom (schematic designator JP2)
JP2_BANK4 "Header 9X2A" FFC/SM0.5-2H18A 6270,15560 r270 bottom (schematic designator JP2)
Q1_PD1 "2N2222" SO-G3/D4.1 6490,13790 r270 top (schematic designator Q1)
Q1_PD2 "2N2222" SO-G3/D4.1 7230,13790 r270 top (schematic designator Q1)
Q1_PD3 "2N2222" SO-G3/D4.1 7970,13790 r270 top (schematic designator Q1)
Q1_PD4 "2N2222" SO-G3/D4.1 8710,13790 r270 top (schematic designator Q1)
Q1_PD5 "2N2222" SO-G3/D4.1 9250,13790 r270 bottom (schematic designator Q1)
Q1_PD6 "2N2222" SO-G3/D4.1 8510,13790 r270 bottom (schematic designator Q1)
Q1_PD7 "2N2222" SO-G3/D4.1 7770,13790 r270 bottom (schematic designator Q1)
Q1_PD8 "2N2222" SO-G3/D4.1 7030,13790 r270 bottom (schematic designator Q1)
Q1_PD9 "2N2222" SO-G3/D4.1 6490,14450 r270 top (schematic designator Q1)
Q1_PD10 "2N2222" SO-G3/D4.1 7230,14450 r270 top (schematic designator Q1)
Q1_PD11 "2N2222" SO-G3/D4.1 7970,14450 r270 top (schematic designator Q1)
Q1_PD12 "2N2222" SO-G3/D4.1 8710,14450 r270 top (schematic designator Q1)
Q1_PD13 "2N2222" SO-G3/D4.1 9250,14450 r270 bottom (schematic designator Q1)
Q1_PD14 "2N2222" SO-G3/D4.1 8510,14450 r270 bottom (schematic designator Q1)
Q1_PD15 "2N2222" SO-G3/D4.1 7770,14450 r270 bottom (schematic designator Q1)
Q1_PD16 "2N2222" SO-G3/D4.1 7030,14450 r270 bottom (schematic designator Q1)
Q1_PD17 "2N2222" SO-G3/D4.1 6490,15110 r270 top (schematic designator Q1)
Q1_PD18 "2N2222" SO-G3/D4.1 7230,15110 r270 top (schematic designator Q1)
Q1_PD19 "2N2222" SO-G3/D4.1 7970,15110 r270 top (schematic designator Q1)
Q1_PD20 "2N2222" SO-G3/D4.1 8710,15110 r270 top (schematic designator Q1)
Q1_PD21 "2N2222" SO-G3/D4.1 9250,15110 r270 bottom (schematic designator Q1)
Q1_PD22 "2N2222" SO-G3/D4.1 8510,15110 r270 bottom (schematic designator Q1)
Q1_PD23 "2N2222" SO-G3/D4.1 7770,15110 r270 bottom (schematic designator Q1)
Q1_PD24 "2N2222" SO-G3/D4.1 7030,15110 r270 bottom (schematic designator Q1)
Q1_PD25 "2N2222" SO-G3/D4.1 6490,15770 r270 top (schematic designator Q1)
Q1_PD26 "2N2222" SO-G3/D4.1 7230,15770 r270 top (schematic designator Q1)
Q1_PD27 "2N2222" SO-G3/D4.1 7970,15770 r270 top (schematic designator Q1)
Q1_PD28 "2N2222" SO-G3/D4.1 8710,15770 r270 top (schematic designator Q1)
Q1_PD29 "2N2222" SO-G3/D4.1 9250,15770 r270 bottom (schematic designator Q1)
Q1_PD30 "2N2222" SO-G3/D4.1 8510,15770 r270 bottom (schematic designator Q1)
Q1_PD31 "2N2222" SO-G3/D4.1 7770,15770 r270 bottom (schematic designator Q1)
Q1_PD32 "2N2222" SO-G3/D4.1 7030,15770 r270 bottom (schematic designator Q1)
R1_PD1 "1.5K" 0603 6896.86,13376.99 r270 top (schematic designator R1)
R1_PD2 "1.5K" 0603 7636.86,13376.99 r270 top (schematic designator R1)
R1_PD3 "1.5K" 0603 8376.86,13376.99 r270 top (schematic designator R1)
R1_PD4 "1.5K" 0603 9116.86,13376.99 r270 top (schematic designator R1)
R1_PD5 "1.5K" 0603 8843.14,13376.99 r270 bottom (schematic designator R1)
R1_PD6 "1.5K" 0603 8103.14,13376.99 r270 bottom (schematic designator R1)
R1_PD7 "1.5K" 0603 7363.14,13376.99 r270 bottom (schematic designator R1)
R1_PD8 "1.5K" 0603 6623.14,13376.99 r270 bottom (schematic designator R1)
R1_PD9 "1.5K" 0603 6896.86,14036.99 r270 top (schematic designator R1)
R1_PD10 "1.5K" 0603 7636.86,14036.99 r270 top (schematic designator R1)
R1_PD11 "1.5K" 0603 8376.86,14036.99 r270 top (schematic designator R1)
R1_PD12 "1.5K" 0603 9116.86,14036.99 r270 top (schematic designator R1)
R1_PD13 "1.5K" 0603 8843.14,14036.99 r270 bottom (schematic designator R1)
R1_PD14 "1.5K" 0603 8103.14,14036.99 r270 bottom (schematic designator R1)
R1_PD15 "1.5K" 0603 7363.14,14036.99 r270 bottom (schematic designator R1)
R1_PD16 "1.5K" 0603 6623.14,14036.99 r270 bottom (schematic designator R1)
R1_PD17 "1.5K" 0603 6896.86,14696.99 r270 top (schematic designator R1)
R1_PD18 "1.5K" 0603 7636.86,14696.99 r270 top (schematic designator R1)
R1_PD19 "1.5K" 0603 8376.86,14696.99 r270 top (schematic designator R1)
R1_PD20 "1.5K" 0603 9116.86,14696.99 r270 top (schematic designator R1)
R1_PD21 "1.5K" 0603 8843.14,14696.99 r270 bottom (schematic designator R1)
R1_PD22 "1.5K" 0603 8103.14,14696.99 r270 bottom (schematic designator R1)
R1_PD23 "1.5K" 0603 7363.14,14696.99 r270 bottom (schematic designator R1)
R1_PD24 "1.5K" 0603 6623.14,14696.99 r270 bottom (schematic designator R1)
R1_PD25 "1.5K" 0603 6896.86,15356.99 r270 top (schematic designator R1)
R1_PD26 "1.5K" 0603 7636.86,15356.99 r270 top (schematic designator R1)
R1_PD27 "1.5K" 0603 8376.86,15356.99 r270 top (schematic designator R1)
R1_PD28 "1.5K" 0603 9116.86,15356.99 r270 top (schematic designator R1)
R1_PD29 "1.5K" 0603 8843.14,15356.99 r270 bottom (schematic designator R1)
R1_PD30 "1.5K" 0603 8103.14,15356.99 r270 bottom (schematic designator R1)
R1_PD31 "1.5K" 0603 7363.14,15356.99 r270 bottom (schematic designator R1)
R1_PD32 "1.5K" 0603 6623.14,15356.99 r270 bottom (schematic designator R1)
R2_PD1 "2.2K" 0603 6713.71,13376.99 r270 top (schematic designator R2)
R2_PD2 "2.2K" 0603 7453.71,13376.99 r270 top (schematic designator R2)
R2_PD3 "2.2K" 0603 8193.71,13376.99 r270 top (schematic designator R2)
R2_PD4 "2.2K" 0603 8933.71,13376.99 r270 top (schematic designator R2)
R2_PD5 "2.2K" 0603 9026.29,13376.99 r270 bottom (schematic designator R2)
R2_PD6 "2.2K" 0603 8286.29,13376.99 r270 bottom (schematic designator R2)
R2_PD7 "2.2K" 0603 7546.29,13376.99 r270 bottom (schematic designator R2)
R2_PD8 "2.2K" 0603 6806.29,13376.99 r270 bottom (schematic designator R2)
R2_PD9 "2.2K" 0603 6713.71,14036.99 r270 top (schematic designator R2)
R2_PD10 "2.2K" 0603 7453.71,14036.99 r270 top (schematic designator R2)
R2_PD11 "2.2K" 0603 8193.71,14036.99 r270 top (schematic designator R2)
R2_PD12 "2.2K" 0603 8933.71,14036.99 r270 top (schematic designator R2)
R2_PD13 "2.2K" 0603 9026.29,14036.99 r270 bottom (schematic designator R2)
R2_PD14 "2.2K" 0603 8286.29,14036.99 r270 bottom (schematic designator R2)
R2_PD15 "2.2K" 0603 7546.29,14036.99 r270 bottom (schematic designator R2)
R2_PD16 "2.2K" 0603 6806.29,14036.99 r270 bottom (schematic designator R2)
R2_PD17 "2.2K" 0603 6713.71,14696.99 r270 top (schematic designator R2)
R2_PD18 "2.2K" 0603 7453.71,14696.99 r270 top (schematic designator R2)
R2_PD19 "2.2K" 0603 8193.71,14696.99 r270 top (schematic designator R2)
R2_PD20 "2.2K" 0603 8933.71,14696.99 r270 top (schematic designator R2)
R2_PD21 "2.2K" 0603 9026.29,14696.99 r270 bottom (schematic designator R2)
R2_PD22 "2.2K" 0603 8286.29,14696.99 r270 bottom (schematic designator R2)
R2_PD23 "2.2K" 0603 7546.29,14696.99 r270 bottom (schematic designator R2)
R2_PD24 "2.2K" 0603 6806.29,14696.99 r270 bottom (schematic designator R2)
R2_PD25 "2.2K" 0603 6713.71,15356.99 r270 top (schematic designator R2)
R2_PD26 "2.2K" 0603 7453.71,15356.99 r270 top (schematic designator R2)
R2_PD27 "2.2K" 0603 8193.71,15356.99 r270 top (schematic designator R2)
R2_PD28 "2.2K" 0603 8933.71,15356.99 r270 top (schematic designator R2)
R2_PD29 "2.2K" 0603 9026.29,15356.99 r270 bottom (schematic designator R2)
R2_PD30 "2.2K" 0603 8286.29,15356.99 r270 bottom (schematic designator R2)
R2_PD31 "2.2K" 0603 7546.29,15356.99 r270 bottom (schematic designator R2)
R2_PD32 "2.2K" 0603 6806.29,15356.99 r270 bottom (schematic designator R2)
R3_PD1 "100K" 0603 6622.14,13322 r90 top (schematic designator R3)
R3_PD2 "100K" 0603 7362.14,13322 r90 top (schematic designator R3)
R3_PD3 "100K" 0603 8102.14,13322 r90 top (schematic designator R3)
R3_PD4 "100K" 0603 8842.14,13322 r90 top (schematic designator R3)
R3_PD5 "100K" 0603 9117.86,13322 r90 bottom (schematic designator R3)
R3_PD6 "100K" 0603 8377.86,13322 r90 bottom (schematic designator R3)
R3_PD7 "100K" 0603 7637.86,13322 r90 bottom (schematic designator R3)
R3_PD8 "100K" 0603 6897.86,13322 r90 bottom (schematic designator R3)
R3_PD9 "100K" 0603 6622.14,13982 r90 top (schematic designator R3)
R3_PD10 "100K" 0603 7362.14,13982 r90 top (schematic designator R3)
R3_PD11 "100K" 0603 8102.14,13982 r90 top (schematic designator R3)
R3_PD12 "100K" 0603 8842.14,13982 r90 top (schematic designator R3)
R3_PD13 "100K" 0603 9117.86,13982 r90 bottom (schematic designator R3)
R3_PD14 "100K" 0603 8377.86,13982 r90 bottom (schematic designator R3)
R3_PD15 "100K" 0603 7637.86,13982 r90 bottom (schematic designator R3)
R3_PD16 "100K" 0603 6897.86,13982 r90 bottom (schematic designator R3)
R3_PD17 "100K" 0603 6622.14,14642 r90 top (schematic designator R3)
R3_PD18 "100K" 0603 7362.14,14642 r90 top (schematic designator R3)
R3_PD19 "100K" 0603 8102.14,14642 r90 top (schematic designator R3)
R3_PD20 "100K" 0603 8842.14,14642 r90 top (schematic designator R3)
R3_PD21 "100K" 0603 9117.86,14642 r90 bottom (schematic designator R3)
R3_PD22 "100K" 0603 8377.86,14642 r90 bottom (schematic designator R3)
R3_PD23 "100K" 0603 7637.86,14642 r90 bottom (schematic designator R3)
R3_PD24 "100K" 0603 6897.86,14642 r90 bottom (schematic designator R3)
R3_PD25 "100K" 0603 6622.14,15302 r90 top (schematic designator R3)
R3_PD26 "100K" 0603 7362.14,15302 r90 top (schematic designator R3)
R3_PD27 "100K" 0603 8102.14,15302 r90 top (schematic designator R3)
R3_PD28 "100K" 0603 8842.14,15302 r90 top (schematic designator R3)
R3_PD29 "100K" 0603 9117.86,15302 r90 bottom (schematic designator R3)
R3_PD30 "100K" 0603 8377.86,15302 r90 bottom (schematic designator R3)
R3_PD31 "100K" 0603 7637.86,15302 r90 bottom (schematic designator R3)
R3_PD32 "100K" 0603 6897.86,15302 r90 bottom (schematic designator R3)
R4_PD1 "10K" 0603 6530.57,13376.99 r270 top (schematic designator R4)
R4_PD2 "10K" 0603 7270.57,13376.99 r270 top (schematic designator R4)
R4_PD3 "10K" 0603 8010.57,13376.99 r270 top (schematic designator R4)
R4_PD4 "10K" 0603 8750.57,13376.99 r270 top (schematic designator R4)
R4_PD5 "10K" 0603 9209.43,13376.99 r270 bottom (schematic designator R4)
R4_PD6 "10K" 0603 8469.43,13376.99 r270 bottom (schematic designator R4)
R4_PD7 "10K" 0603 7729.43,13376.99 r270 bottom (schematic designator R4)
R4_PD8 "10K" 0603 6989.43,13376.99 r270 bottom (schematic designator R4)
R4_PD9 "10K" 0603 6530.57,14036.99 r270 top (schematic designator R4)
R4_PD10 "10K" 0603 7270.57,14036.99 r270 top (schematic designator R4)
R4_PD11 "10K" 0603 8010.57,14036.99 r270 top (schematic designator R4)
R4_PD12 "10K" 0603 8750.57,14036.99 r270 top (schematic designator R4)
R4_PD13 "10K" 0603 9209.43,14036.99 r270 bottom (schematic designator R4)
R4_PD14 "10K" 0603 8469.43,14036.99 r270 bottom (schematic designator R4)
R4_PD15 "10K" 0603 7729.43,14036.99 r270 bottom (schematic designator R4)
R4_PD16 "10K" 0603 6989.43,14036.99 r270 bottom (schematic designator R4)
R4_PD17 "10K" 0603 6530.57,14696.99 r270 top (schematic designator R4)
R4_PD18 "10K" 0603 7270.57,14696.99 r270 top (schematic designator R4)
R4_PD19 "10K" 0603 8010.57,14696.99 r270 top (schematic designator R4)
R4_PD20 "10K" 0603 8750.57,14696.99 r270 top (schematic designator R4)
R4_PD21 "10K" 0603 9209.43,14696.99 r270 bottom (schematic designator R4)
R4_PD22 "10K" 0603 8469.43,14696.99 r270 bottom (schematic designator R4)
R4_PD23 "10K" 0603 7729.43,14696.99 r270 bottom (schematic designator R4)
R4_PD24 "10K" 0603 6989.43,14696.99 r270 bottom (schematic designator R4)
R4_PD25 "10K" 0603 6530.57,15356.99 r270 top (schematic designator R4)
R4_PD26 "10K" 0603 7270.57,15356.99 r270 top (schematic designator R4)
R4_PD27 "10K" 0603 8010.57,15356.99 r270 top (schematic designator R4)
R4_PD28 "10K" 0603 8750.57,15356.99 r270 top (schematic designator R4)
R4_PD29 "10K" 0603 9209.43,15356.99 r270 bottom (schematic designator R4)
R4_PD30 "10K" 0603 8469.43,15356.99 r270 bottom (schematic designator R4)
R4_PD31 "10K" 0603 7729.43,15356.99 r270 bottom (schematic designator R4)
R4_PD32 "10K" 0603 6989.43,15356.99 r270 bottom (schematic designator R4)
R5_PD1 "1K" 0603 6439,13322 r90 top (schematic designator R5)
R5_PD2 "1K" 0603 7179,13322 r90 top (schematic designator R5)
R5_PD3 "1K" 0603 7919,13322 r90 top (schematic designator R5)
R5_PD4 "1K" 0603 8659,13322 r90 top (schematic designator R5)
R5_PD5 "1K" 0603 9301,13322 r90 bottom (schematic designator R5)
R5_PD6 "1K" 0603 8561,13322 r90 bottom (schematic designator R5)
R5_PD7 "1K" 0603 7821,13322 r90 bottom (schematic designator R5)
R5_PD8 "1K" 0603 7081,13322 r90 bottom (schematic designator R5)
R5_PD9 "1K" 0603 6439,13982 r90 top (schematic designator R5)
R5_PD10 "1K" 0603 7179,13982 r90 top (schematic designator R5)
R5_PD11 "1K" 0603 7919,13982 r90 top (schematic designator R5)
R5_PD12 "1K" 0603 8659,13982 r90 top (schematic designator R5)
R5_PD13 "1K" 0603 9301,13982 r90 bottom (schematic designator R5)
R5_PD14 "1K" 0603 8561,13982 r90 bottom (schematic designator R5)
R5_PD15 "1K" 0603 7821,13982 r90 bottom (schematic designator R5)
R5_PD16 "1K" 0603 7081,13982 r90 bottom (schematic designator R5)
R5_PD17 "1K" 0603 6439,14642 r90 top (schematic designator R5)
R5_PD18 "1K" 0603 7179,14642 r90 top (schematic designator R5)
R5_PD19 "1K" 0603 7919,14642 r90 top (schematic designator R5)
R5_PD20 "1K" 0603 8659,14642 r90 top (schematic designator R5)
R5_PD21 "1K" 0603 9301,14642 r90 bottom (schematic designator R5)
R5_PD22 "1K" 0603 8561,14642 r90 bottom (schematic designator R5)
R5_PD23 "1K" 0603 7821,14642 r90 bottom (schematic designator R5)
R5_PD24 "1K" 0603 7081,14642 r90 bottom (schematic designator R5)
R5_PD25 "1K" 0603 6439,15302 r90 top (schematic designator R5)
R5_PD26 "1K" 0603 7179,15302 r90 top (schematic designator R5)
R5_PD27 "1K" 0603 7919,15302 r90 top (schematic designator R5)
R5_PD28 "1K" 0603 8659,15302 r90 top (schematic designator R5)
R5_PD29 "1K" 0603 9301,15302 r90 bottom (schematic designator R5)
R5_PD30 "1K" 0603 8561,15302 r90 bottom (schematic designator R5)
R5_PD31 "1K" 0603 7821,15302 r90 bottom (schematic designator R5)
R5_PD32 "1K" 0603 7081,15302 r90 bottom (schematic designator R5)
R6_PD1 "10K" 0603 6988.43,13322 r90 top (schematic designator R6)
R6_PD2 "10K" 0603 7728.43,13322 r90 top (schematic designator R6)
R6_PD3 "10K" 0603 8468.43,13322 r90 top (schematic designator R6)
R6_PD4 "10K" 0603 9208.43,13322 r90 top (schematic designator R6)
R6_PD5 "10K" 0603 8751.57,13322 r90 bottom (schematic designator R6)
R6_PD6 "10K" 0603 8011.57,13322 r90 bottom (schematic designator R6)
R6_PD7 "10K" 0603 7271.57,13322 r90 bottom (schematic designator R6)
R6_PD8 "10K" 0603 6531.57,13322 r90 bottom (schematic designator R6)
R6_PD9 "10K" 0603 6988.43,13982 r90 top (schematic designator R6)
R6_PD10 "10K" 0603 7728.43,13982 r90 top (schematic designator R6)
R6_PD11 "10K" 0603 8468.43,13982 r90 top (schematic designator R6)
R6_PD12 "10K" 0603 9208.43,13982 r90 top (schematic designator R6)
R6_PD13 "10K" 0603 8751.57,13982 r90 bottom (schematic designator R6)
R6_PD14 "10K" 0603 8011.57,13982 r90 bottom (schematic designator R6)
R6_PD15 "10K" 0603 7271.57,13982 r90 bottom (schematic designator R6)
R6_PD16 "10K" 0603 6531.57,13982 r90 bottom (schematic designator R6)
R6_PD17 "10K" 0603 6988.43,14642 r90 top (schematic designator R6)
R6_PD18 "10K" 0603 7728.43,14642 r90 top (schematic designator R6)
R6_PD19 "10K" 0603 8468.43,14642 r90 top (schematic designator R6)
R6_PD20 "10K" 0603 9208.43,14642 r90 top (schematic designator R6)
R6_PD21 "10K" 0603 8751.57,14642 r90 bottom (schematic designator R6)
R6_PD22 "10K" 0603 8011.57,14642 r90 bottom (schematic designator R6)
R6_PD23 "10K" 0603 7271.57,14642 r90 bottom (schematic designator R6)
R6_PD24 "10K" 0603 6531.57,14642 r90 bottom (schematic designator R6)
R6_PD25 "10K" 0603 6988.43,15302 r90 top (schematic designator R6)
R6_PD26 "10K" 0603 7728.43,15302 r90 top (schematic designator R6)
R6_PD27 "10K" 0603 8468.43,15302 r90 top (schematic designator R6)
R6_PD28 "10K" 0603 9208.43,15302 r90 top (schematic designator R6)
R6_PD29 "10K" 0603 8751.57,15302 r90 bottom (schematic designator R6)
R6_PD30 "10K" 0603 8011.57,15302 r90 bottom (schematic designator R6)
R6_PD31 "10K" 0603 7271.57,15302 r90 bottom (schematic designator R6)
R6_PD32 "10K" 0603 6531.57,15302 r90 bottom (schematic designator R6)
R8_PD1 "22K" 0603 7080,13320 r90 top (schematic designator R8)
R8_PD2 "22K" 0603 7820,13320 r90 top (schematic designator R8)
R8_PD3 "22K" 0603 8560,13320 r90 top (schematic designator R8)
R8_PD4 "22K" 0603 9300,13320 r90 top (schematic designator R8)
R8_PD5 "22K" 0603 8660,13320 r90 bottom (schematic designator R8)
R8_PD6 "22K" 0603 7920,13320 r90 bottom (schematic designator R8)
R8_PD7 "22K" 0603 7180,13320 r90 bottom (schematic designator R8)
R8_PD8 "22K" 0603 6440,13320 r90 bottom (schematic designator R8)
R8_PD9 "22K" 0603 7080,13980 r90 top (schematic designator R8)
R8_PD10 "22K" 0603 7820,13980 r90 top (schematic designator R8)
R8_PD11 "22K" 0603 8560,13980 r90 top (schematic designator R8)
R8_PD12 "22K" 0603 9300,13980 r90 top (schematic designator R8)
R8_PD13 "22K" 0603 8660,13980 r90 bottom (schematic designator R8)
R8_PD14 "22K" 0603 7920,13980 r90 bottom (schematic designator R8)
R8_PD15 "22K" 0603 7180,13980 r90 bottom (schematic designator R8)
R8_PD16 "22K" 0603 6440,13980 r90 bottom (schematic designator R8)
R8_PD17 "22K" 0603 7080,14640 r90 top (schematic designator R8)
R8_PD18 "22K" 0603 7820,14640 r90 top (schematic designator R8)
R8_PD19 "22K" 0603 8560,14640 r90 top (schematic designator R8)
R8_PD20 "22K" 0603 9300,14640 r90 top (schematic designator R8)
R8_PD21 "22K" 0603 8660,14640 r90 bottom (schematic designator R8)
R8_PD22 "22K" 0603 7920,14640 r90 bottom (schematic designator R8)
R8_PD23 "22K" 0603 7180,14640 r90 bottom (schematic designator R8)
R8_PD24 "22K" 0603 6440,14640 r90 bottom (schematic designator R8)
R8_PD25 "22K" 0603 7080,15300 r90 top (schematic designator R8)
R8_PD26 "22K" 0603 7820,15300 r90 top (schematic designator R8)
R8_PD27 "22K" 0603 8560,15300 r90 top (schematic designator R8)
R8_PD28 "22K" 0603 9300,15300 r90 top (schematic designator R8)
R8_PD29 "22K" 0603 8660,15300 r90 bottom (schematic designator R8)
R8_PD30 "22K" 0603 7920,15300 r90 bottom (schematic designator R8)
R8_PD31 "22K" 0603 7180,15300 r90 bottom (schematic designator R8)
R8_PD32 "22K" 0603 6440,15300 r90 bottom (schematic designator R8)
R88_PD1 "1.0" 0603 6970,13680 r90 top (schematic designator R88)
R88_PD2 "1.0" 0603 7710,13680 r90 top (schematic designator R88)
R88_PD3 "1.0" 0603 8450,13680 r90 top (schematic designator R88)
R88_PD4 "1.0" 0603 9190,13680 r90 top (schematic designator R88)
R88_PD5 "1.0" 0603 8770,13680 r90 bottom (schematic designator R88)
R88_PD6 "1.0" 0603 8030,13680 r90 bottom (schematic designator R88)
R88_PD7 "1.0" 0603 7290,13680 r90 bottom (schematic designator R88)
R88_PD8 "1.0" 0603 6550,13680 r90 bottom (schematic designator R88)
R88_PD9 "1.0" 0603 6970,14340 r90 top (schematic designator R88)
R88_PD10 "1.0" 0603 7710,14340 r90 top (schematic designator R88)
R88_PD11 "1.0" 0603 8450,14340 r90 top (schematic designator R88)
R88_PD12 "1.0" 0603 9190,14340 r90 top (schematic designator R88)
R88_PD13 "1.0" 0603 8770,14340 r90 bottom (schematic designator R88)
R88_PD14 "1.0" 0603 8030,14340 r90 bottom (schematic designator R88)
R88_PD15 "1.0" 0603 7290,14340 r90 bottom (schematic designator R88)
R88_PD16 "1.0" 0603 6550,14340 r90 bottom (schematic designator R88)
R88_PD17 "1.0" 0603 6970,15000 r90 top (schematic designator R88)
R88_PD18 "1.0" 0603 7710,15000 r90 top (schematic designator R88)
R88_PD19 "1.0" 0603 8450,15000 r90 top (schematic designator R88)
R88_PD20 "1.0" 0603 9190,15000 r90 top (schematic designator R88)
R88_PD21 "1.0" 0603 8770,15000 r90 bottom (schematic designator R88)
R88_PD22 "1.0" 0603 8030,15000 r90 bottom (schematic designator R88)
R88_PD23 "1.0" 0603 7290,15000 r90 bottom (schematic designator R88)
R88_PD24 "1.0" 0603 6550,15000 r90 bottom (schematic designator R88)
R88_PD25 "1.0" 0603 6970,15660 r90 top (schematic designator R88)
R88_PD26 "1.0" 0603 7710,15660 r90 top (schematic designator R88)
R88_PD27 "1.0" 0603 8450,15660 r90 top (schematic designator R88)
R88_PD28 "1.0" 0603 9190,15660 r90 top (schematic designator R88)
R88_PD29 "1.0" 0603 8770,15660 r90 bottom (schematic designator R88)
R88_PD30 "1.0" 0603 8030,15660 r90 bottom (schematic designator R88)
R88_PD31 "1.0" 0603 7290,15660 r90 bottom (schematic designator R88)
R88_PD32 "1.0" 0603 6550,15660 r90 bottom (schematic designator R88)
RPOT_PD1 "2.5K" 0603 6805.29,13376.99 r270 top (schematic designator RPOT)
RPOT_PD2 "2.5K" 0603 7545.29,13376.99 r270 top (schematic designator RPOT)
RPOT_PD3 "2.5K" 0603 8285.29,13376.99 r270 top (schematic designator RPOT)
RPOT_PD4 "2.5K" 0603 9025.29,13376.99 r270 top (schematic designator RPOT)
RPOT_PD5 "2.5K" 0603 8934.71,13376.99 r270 bottom (schematic designator RPOT)
RPOT_PD6 "2.5K" 0603 8194.71,13376.99 r270 bottom (schematic designator RPOT)
RPOT_PD7 "2.5K" 0603 7454.71,13376.99 r270 bottom (schematic designator RPOT)
RPOT_PD8 "2.5K" 0603 6714.71,13376.99 r270 bottom (schematic designator RPOT)
RPOT_PD9 "2.5K" 0603 6805.29,14036.99 r270 top (schematic designator RPOT)
RPOT_PD10 "2.5K" 0603 7545.29,14036.99 r270 top (schematic designator RPOT)
RPOT_PD11 "2.5K" 0603 8285.29,14036.99 r270 top (schematic designator RPOT)
RPOT_PD12 "2.5K" 0603 9025.29,14036.99 r270 top (schematic designator RPOT)
RPOT_PD13 "2.5K" 0603 8934.71,14036.99 r270 bottom (schematic designator RPOT)
RPOT_PD14 "2.5K" 0603 8194.71,14036.99 r270 bottom (schematic designator RPOT)
RPOT_PD15 "2.5K" 0603 7454.71,14036.99 r270 bottom (schematic designator RPOT)